# Altium PCB bug-brain__A.PcbDoc (part 1 of 2)
Units mm, origin at the board's own origin, x right, y up, seen from the top; angles counter-clockwise.
Board outline 50.8 x 50.8 mm, 6 copper layers (Top Layer, GND1, IN1, IN2, GND2, Bottom Layer), stack 2.491 mm thick; 50 components, 73 nets, 290 pads, 119 vias.
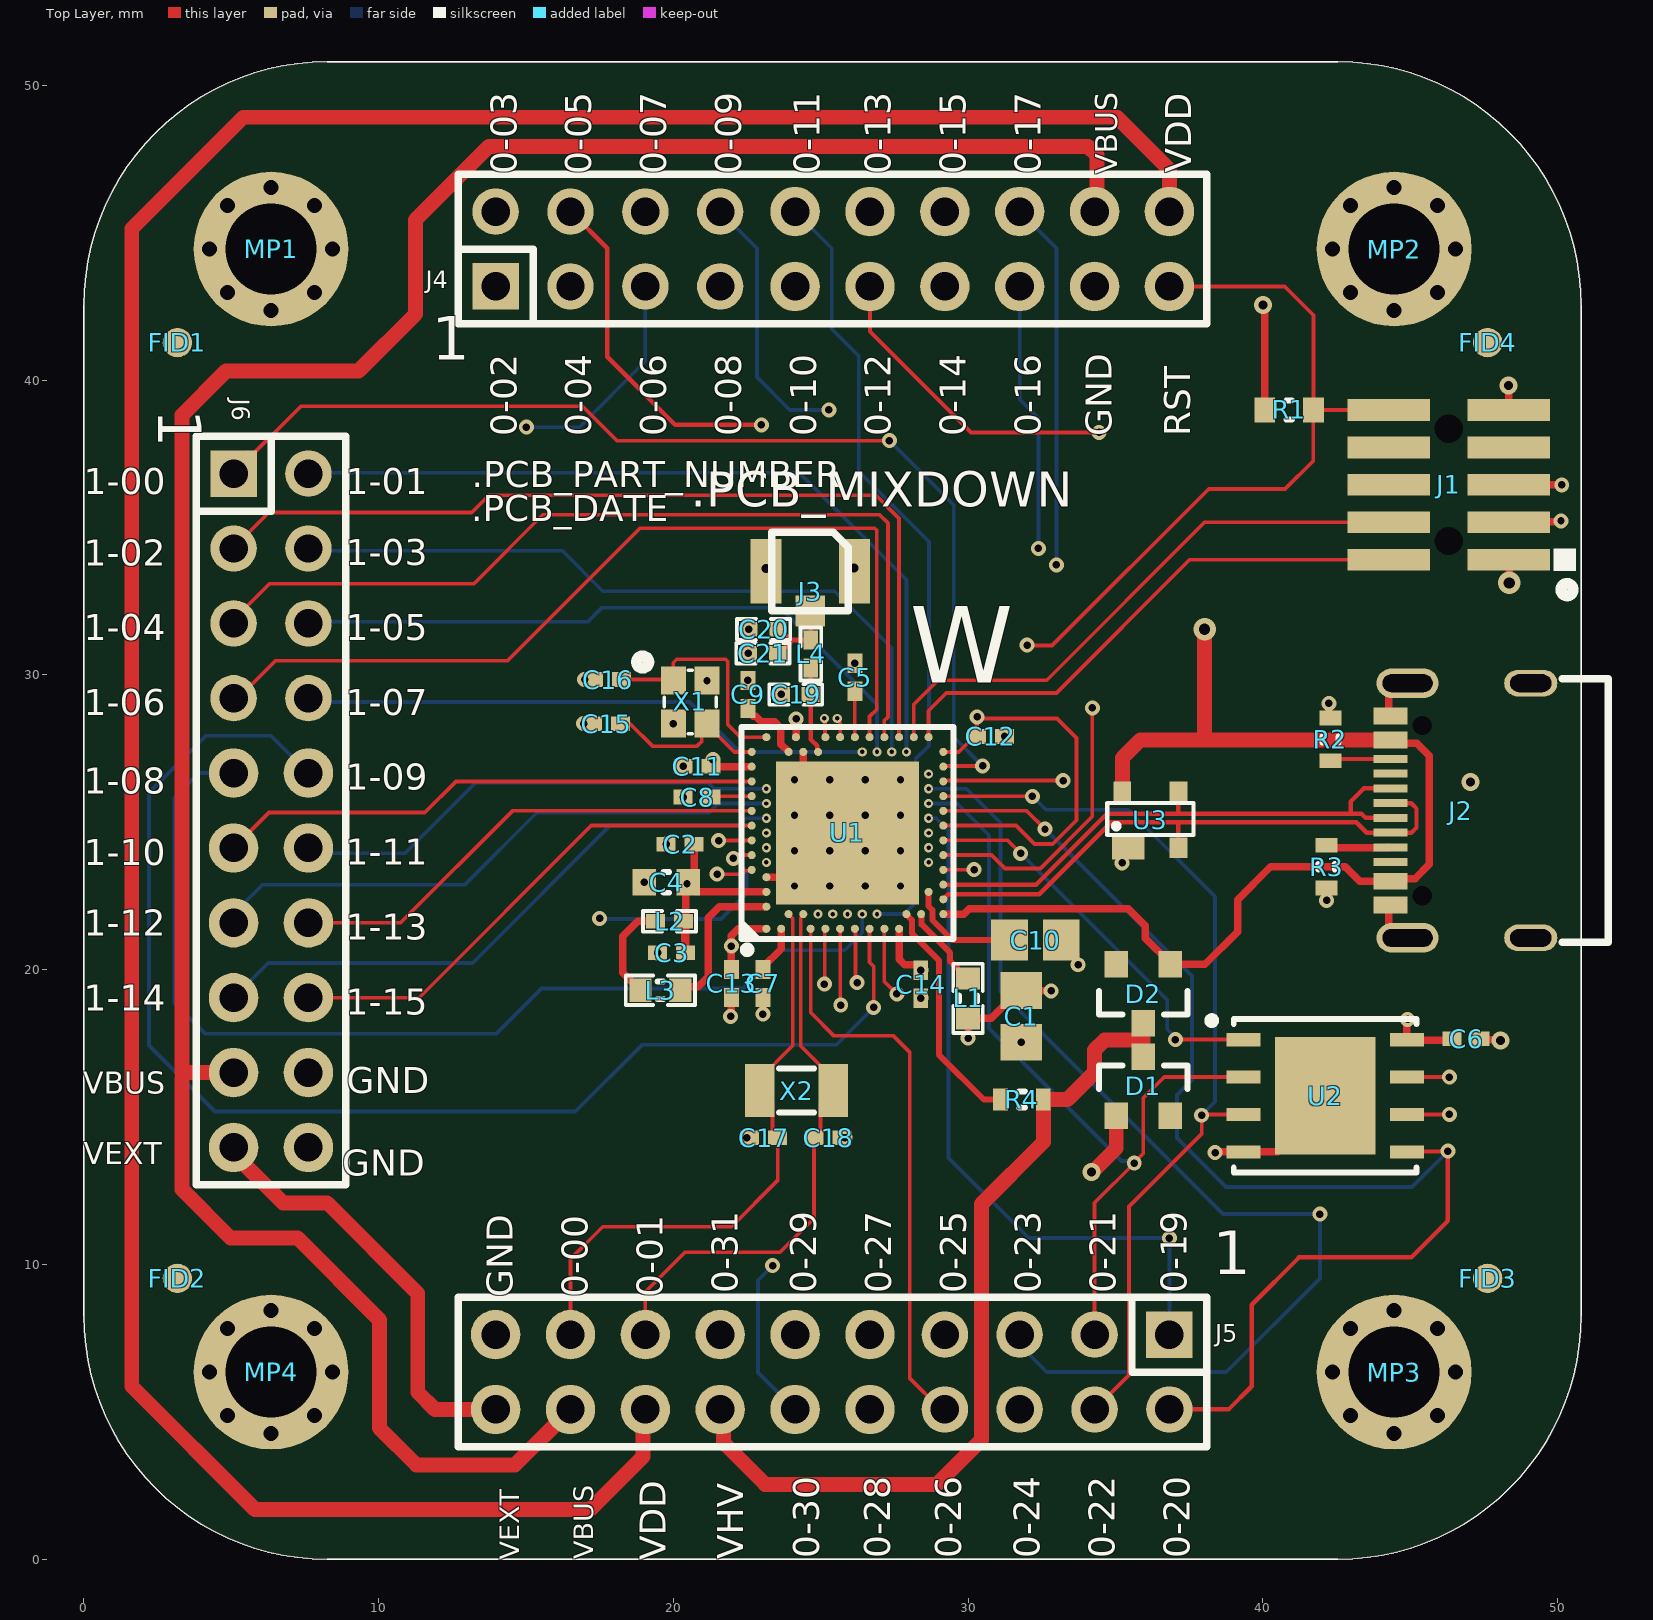
[diagram p0: Top Layer view]
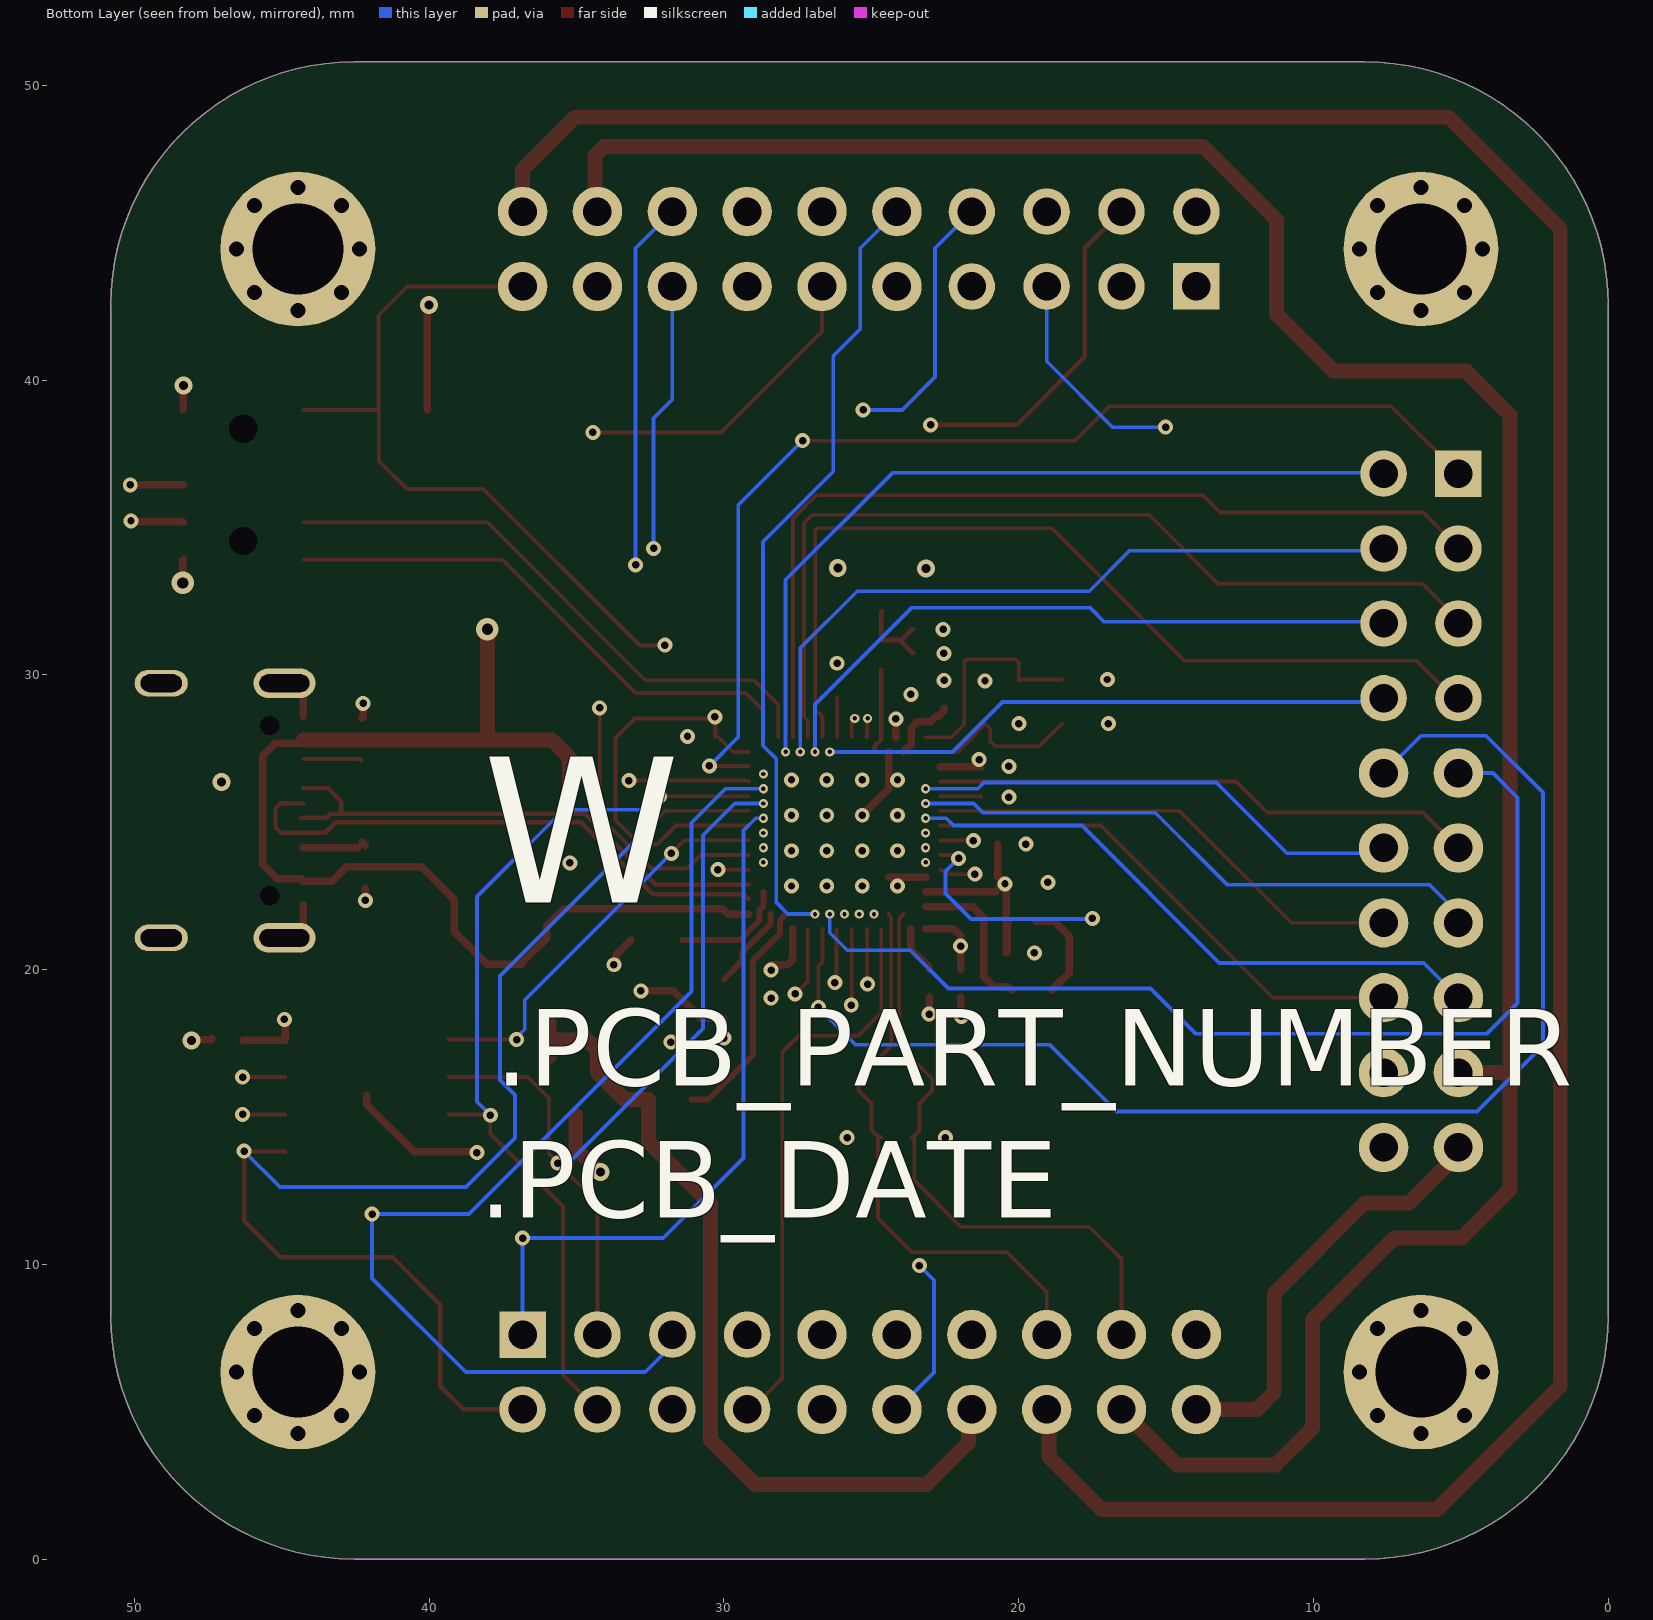
[diagram p1: Bottom Layer view, seen from below]
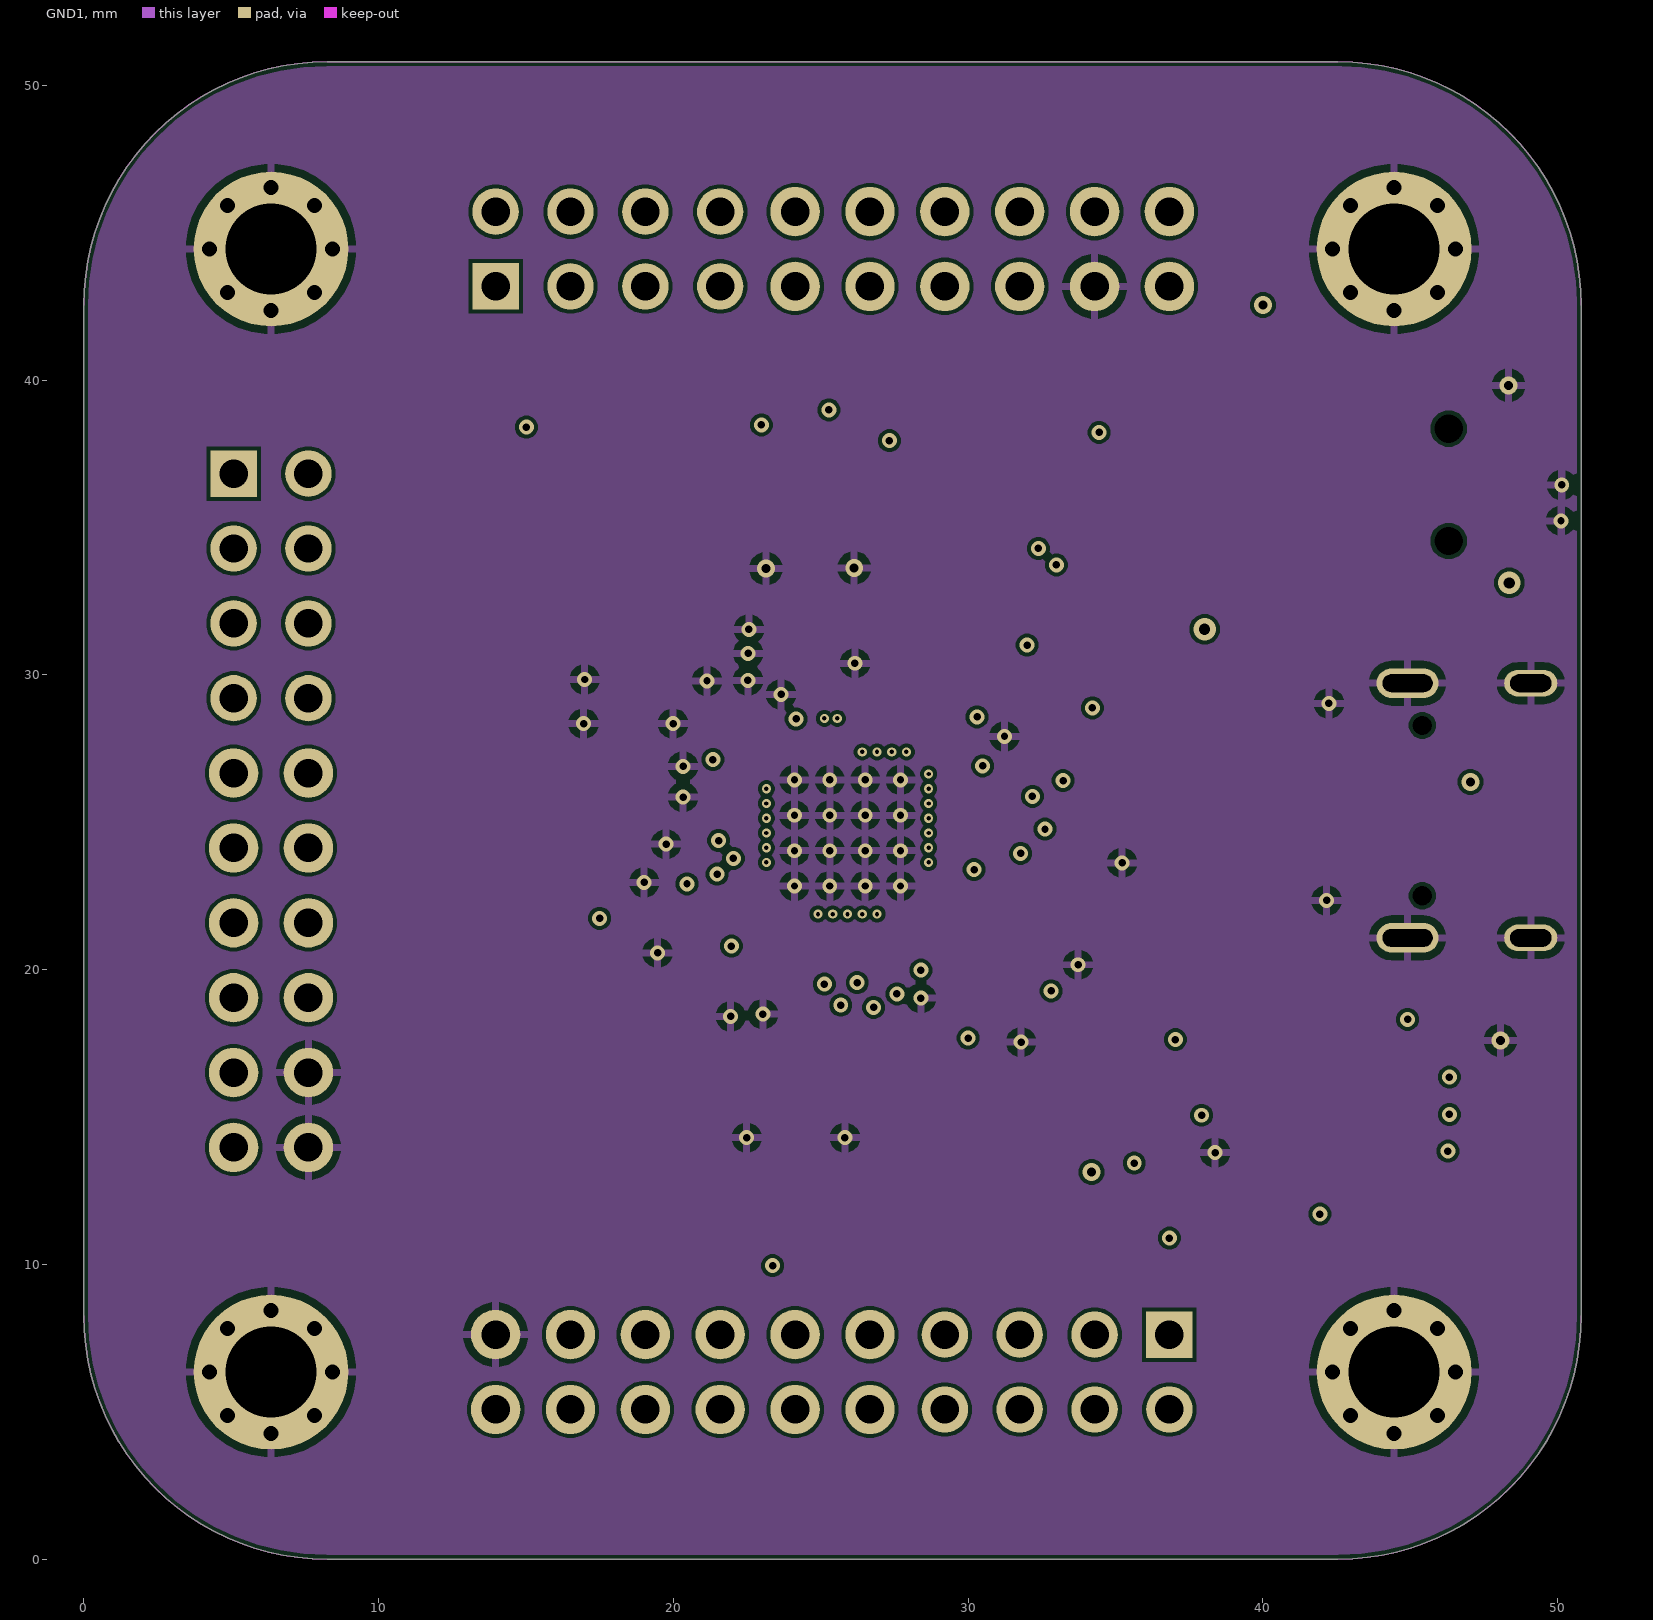
[diagram p2: GND1]
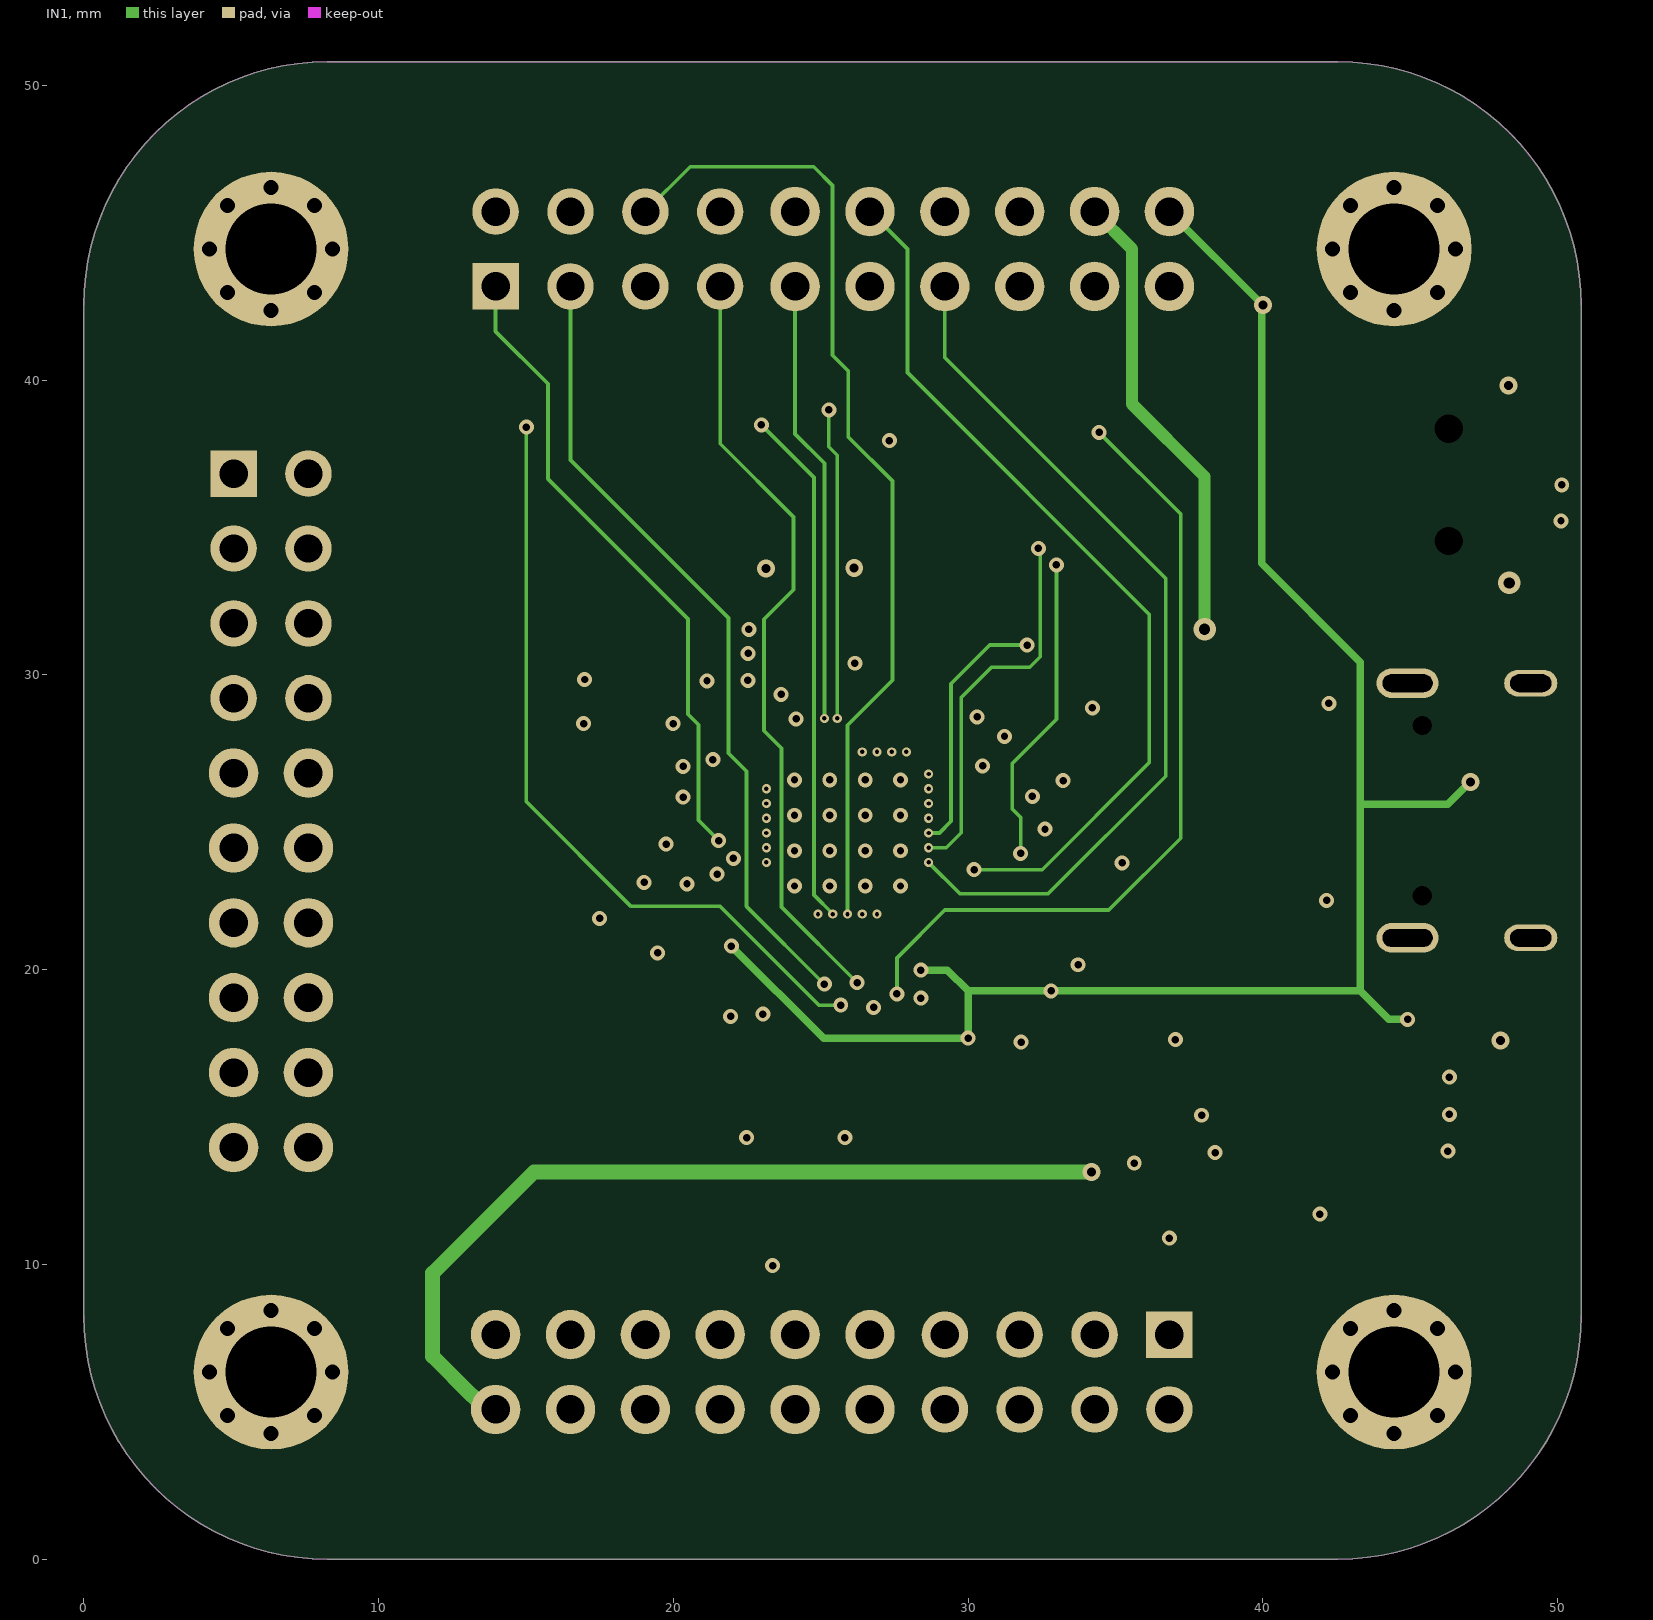
[diagram p3: IN1]
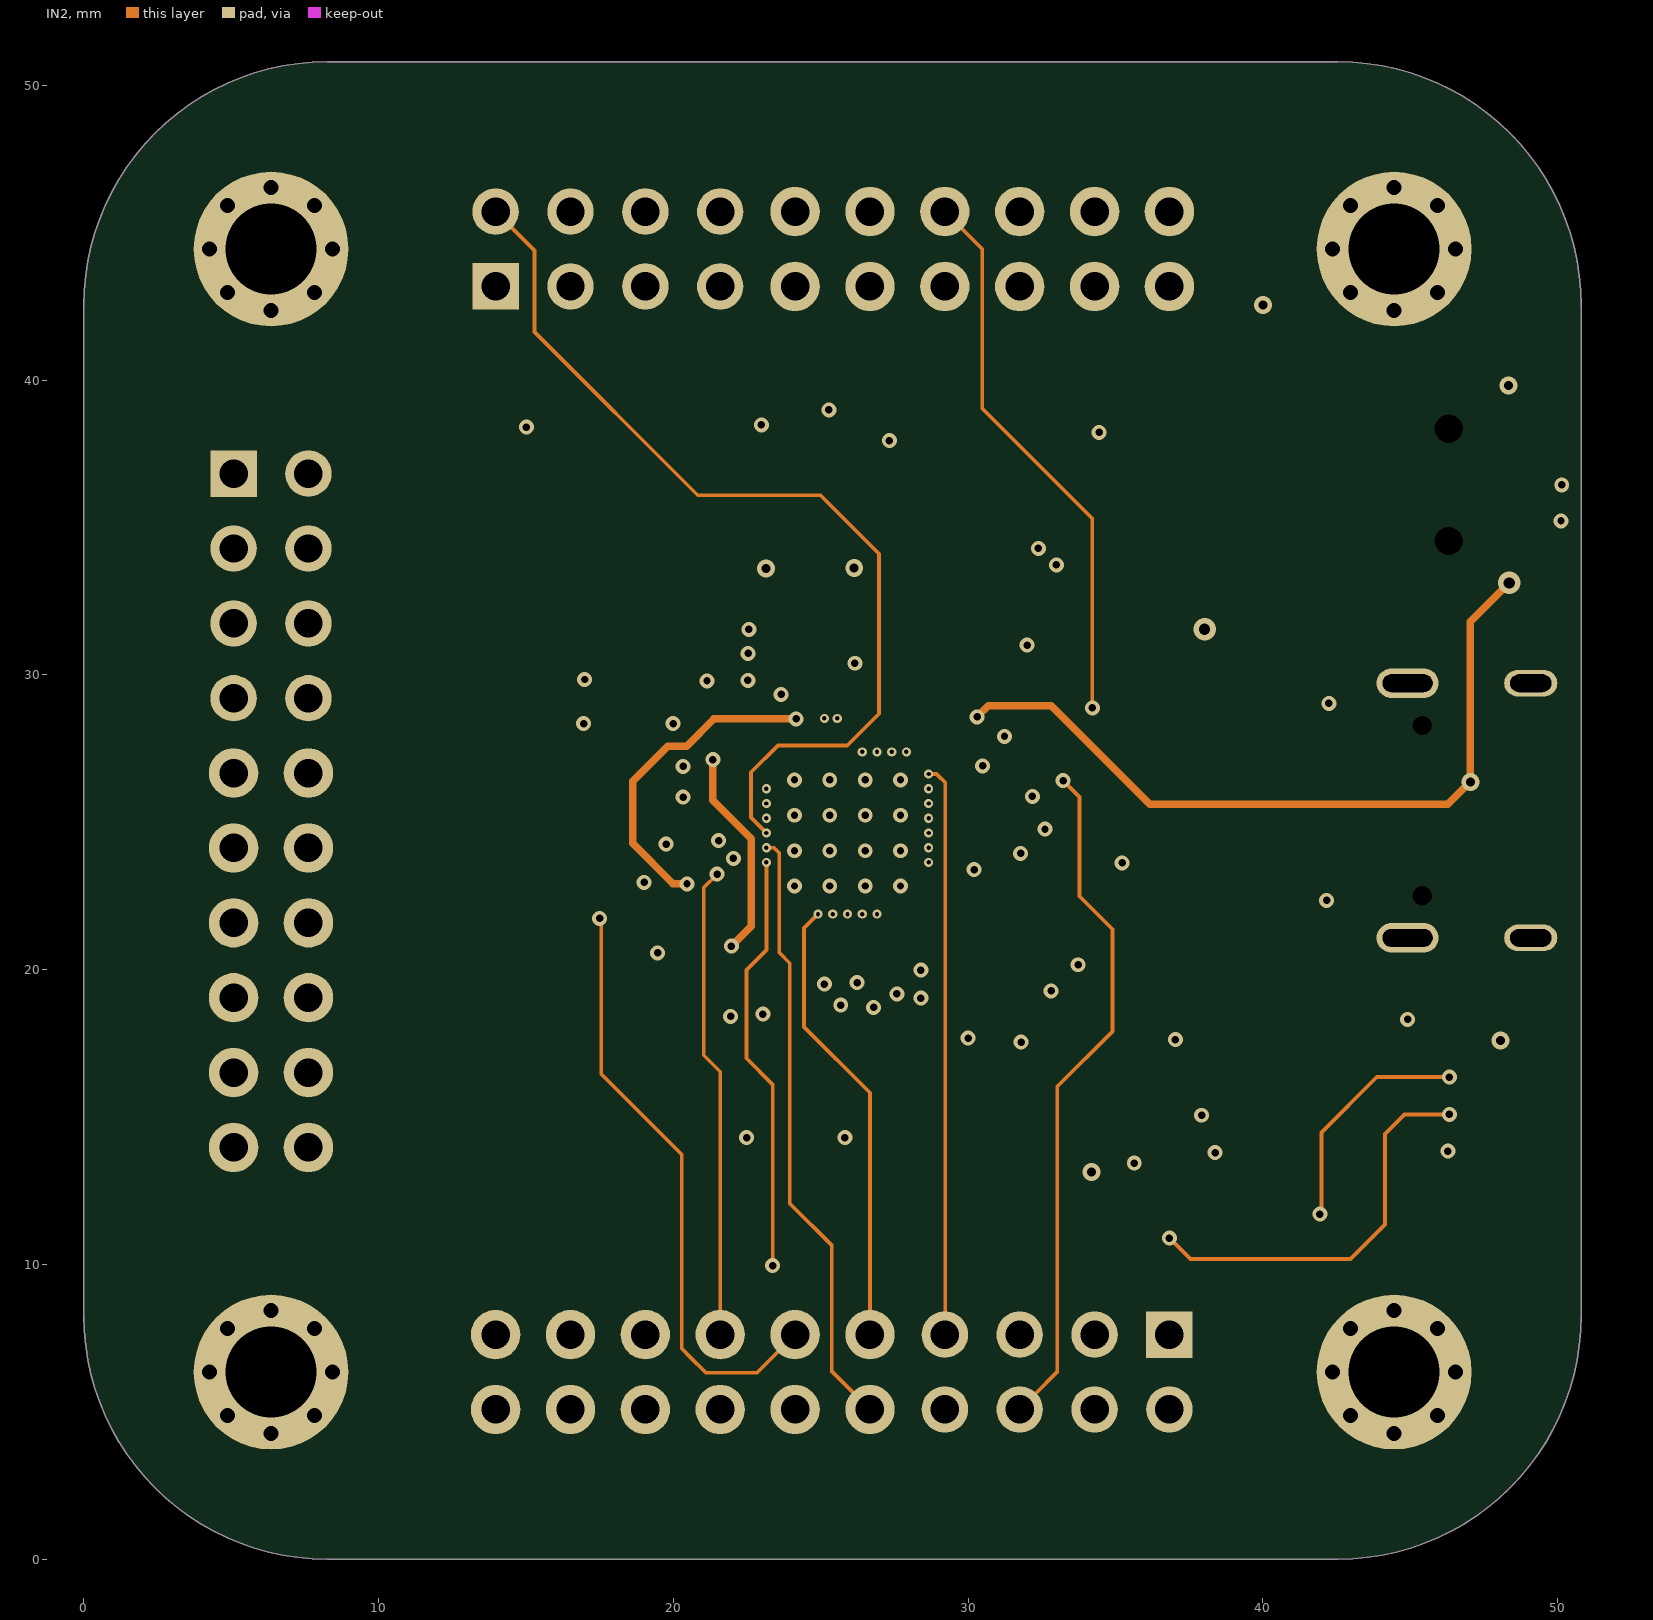
[diagram p4: IN2]
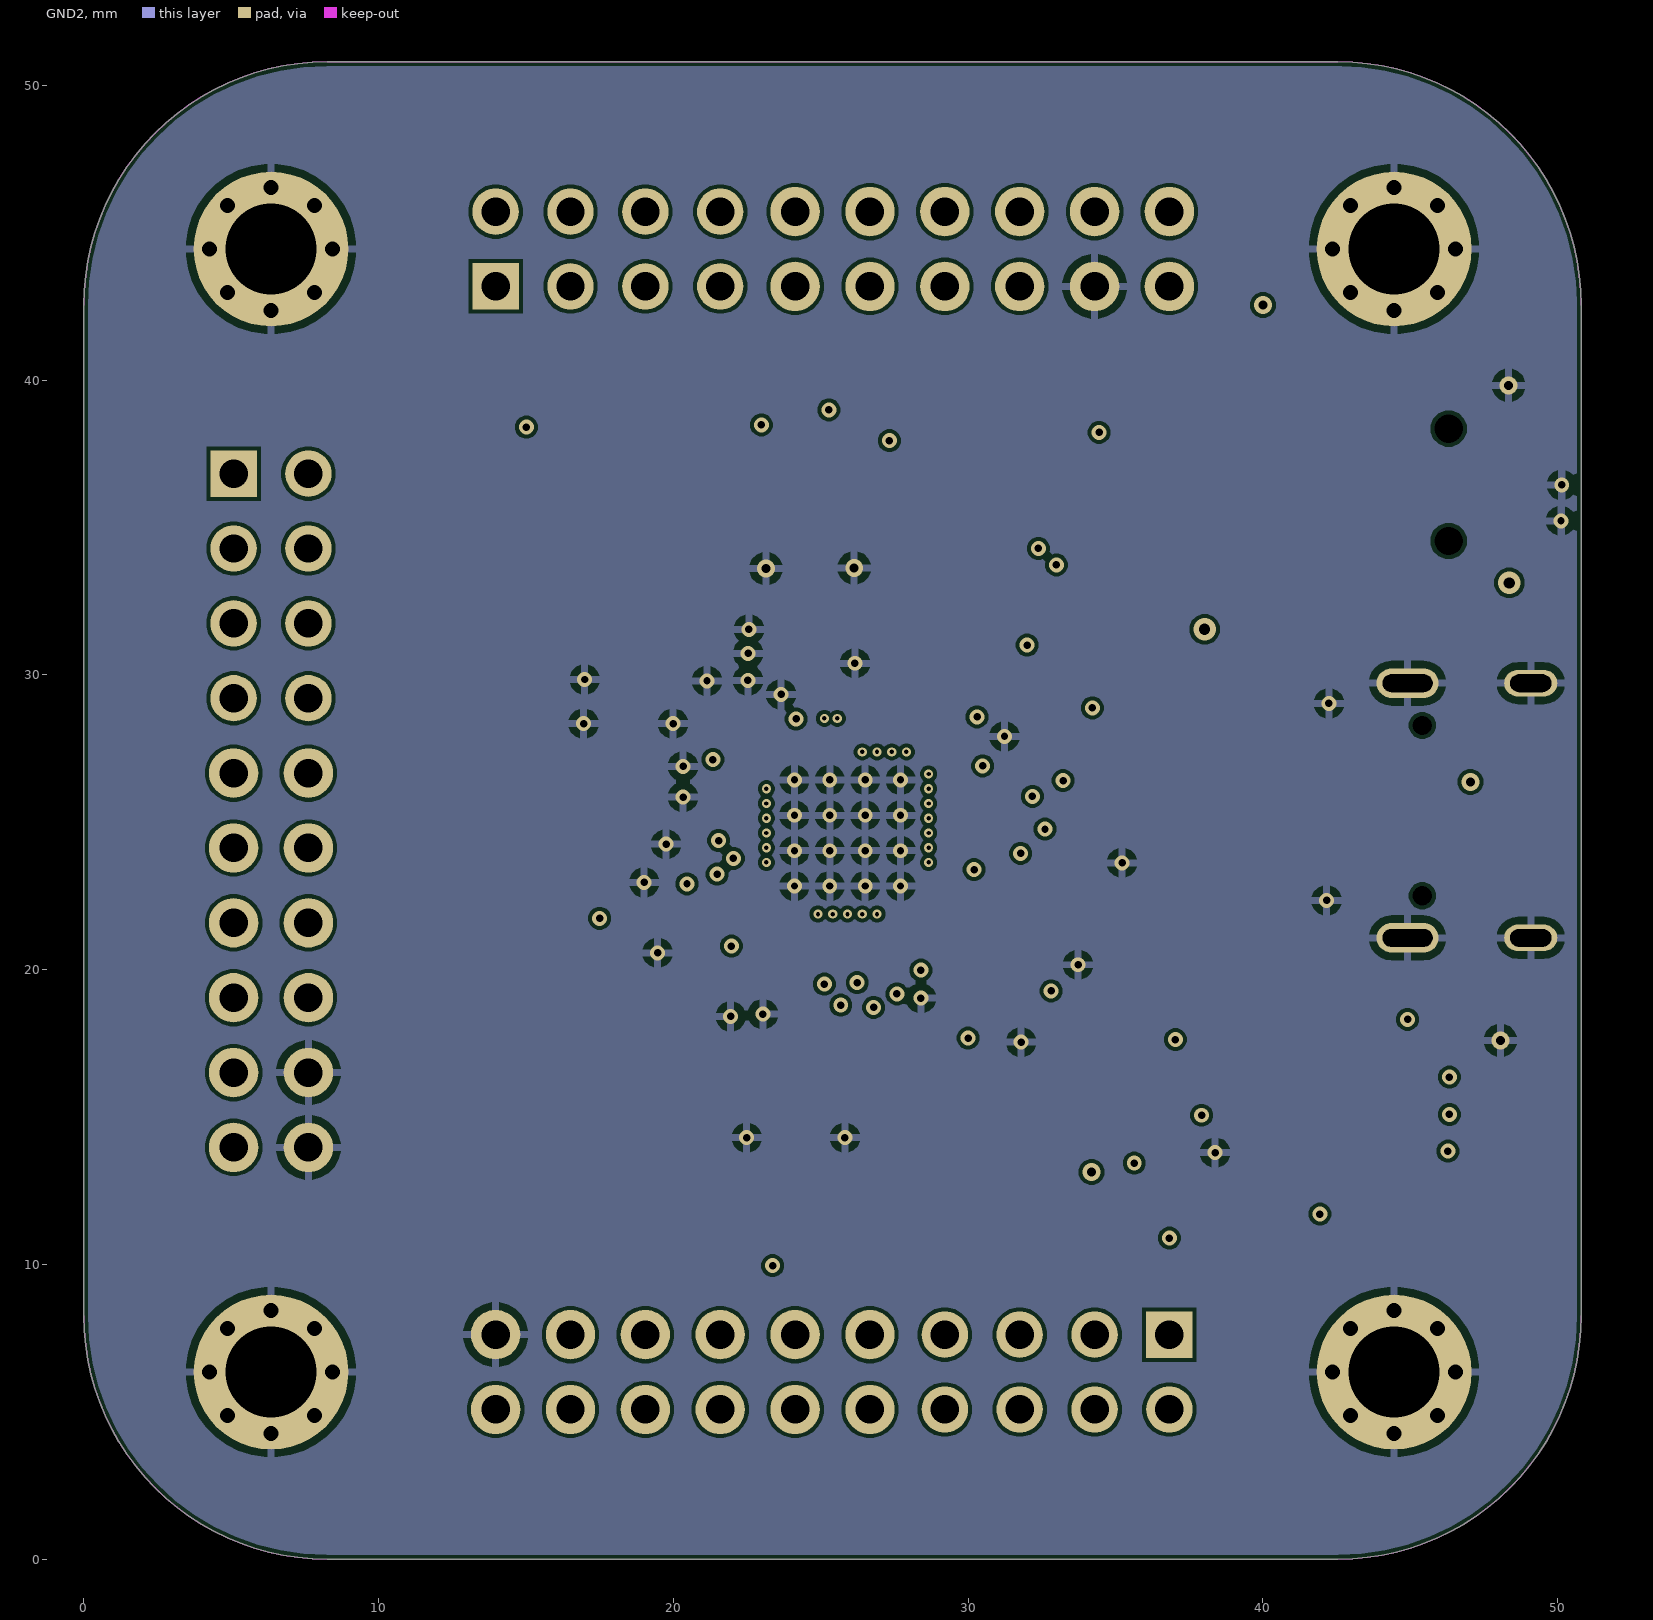
[diagram p5: GND2]
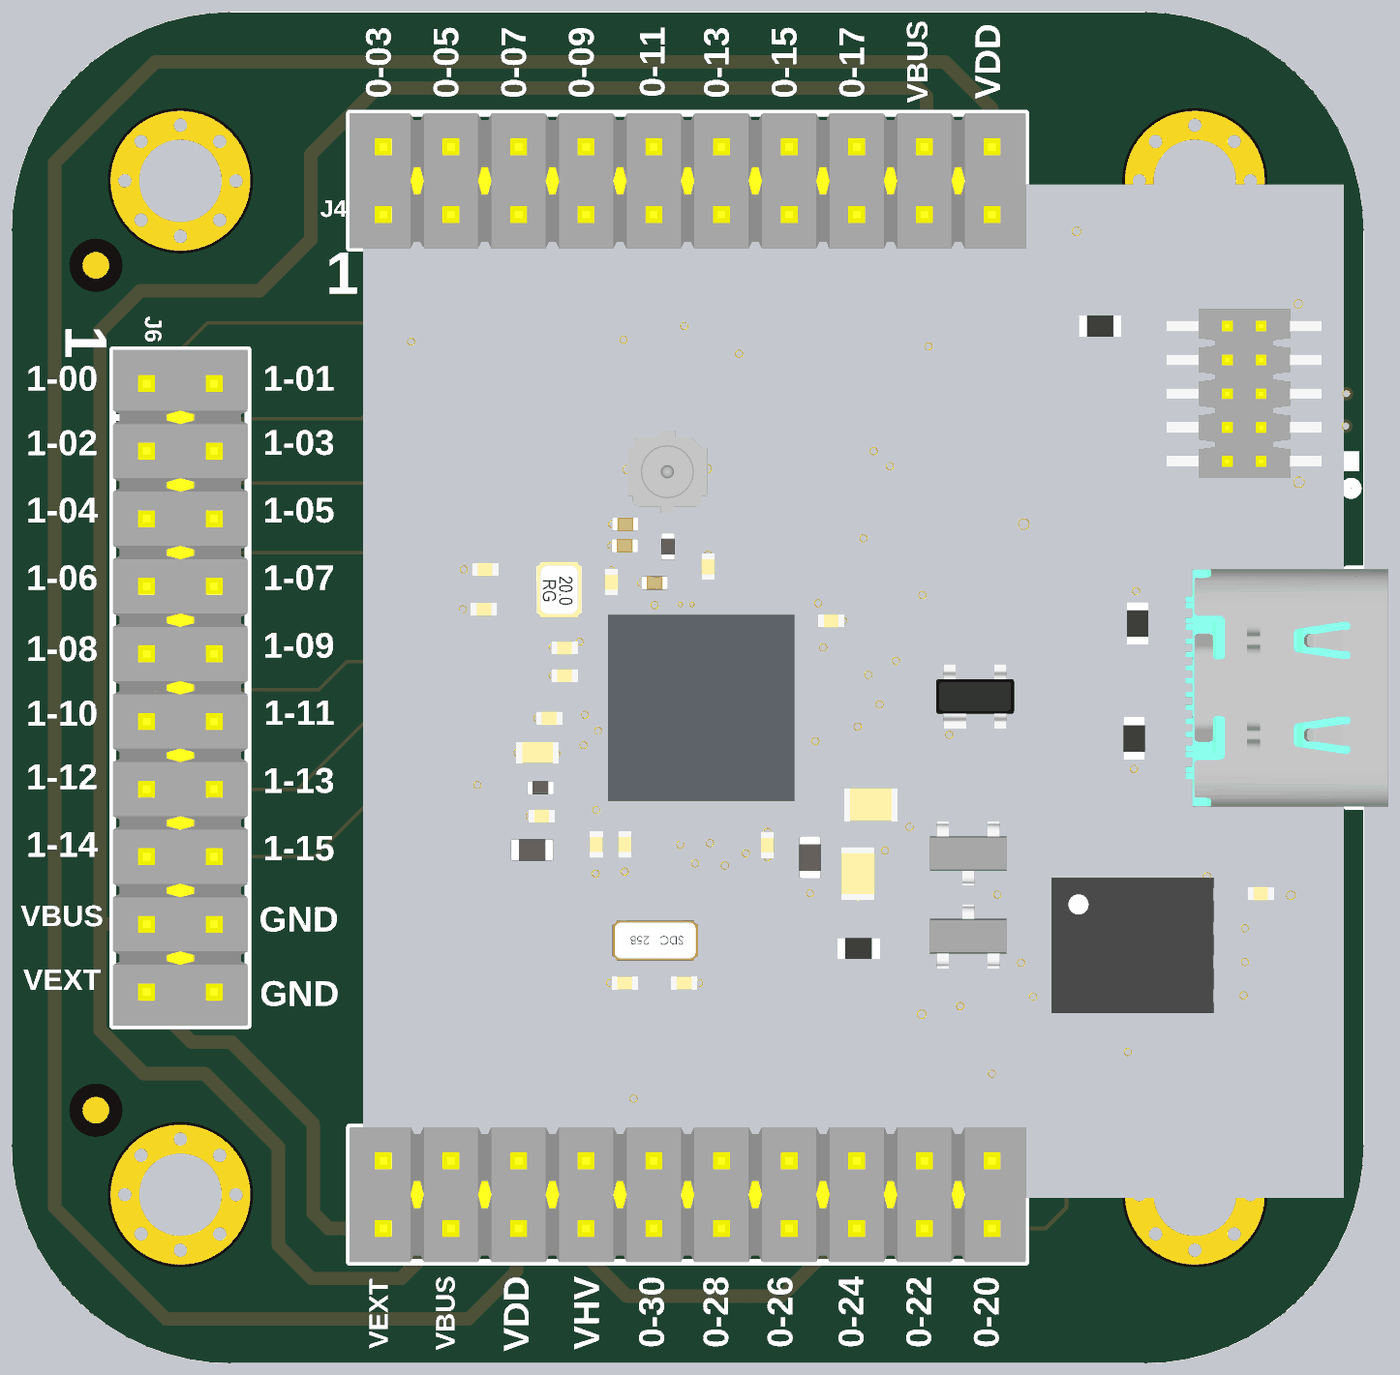
[diagram p6: 3D render of the assembled board from above, using the file's embedded part models]

## Layer stack, top to bottom
Top Solder: solder mask 0.0102, Solder Resist, Dk 3.5
Top Layer: signal copper 0.0356
Dielectric1: dielectric 1.4961, FR-4, Dk 4.8
GND1: signal copper 0.0356
Dielectric 1: prepreg 0.0711, PP-006, Dk 4.1
IN1: signal copper 0.035
Dielectric3: dielectric 0.32, FR-4, Dk 4.8
IN2: signal copper 0.035
Dielectric 2: prepreg 0.0711, PP-006, Dk 4.1
GND2: signal copper 0.0356
Dielectric2: dielectric 0.32, FR-4, Dk 4.8
Bottom Layer: signal copper 0.0356
Bottom Solder: solder mask 0.0102, Solder Resist, Dk 3.5

## Board outline
0,8.255 ccw(c8.255,8.255) 8.255,0 42.545,0 ccw(c42.545,8.255) 50.8,8.255 50.8,42.545 ccw(c42.545,42.545) 42.545,50.8 8.255,50.8 ccw(c8.255,42.545) 0,42.545

## Design rules (kind name [scope] priority, off if disabled: settings)
Clearance [All] p1: gap=0.127 ignorepadtopadclearanceinfootprint=FALSE
ComponentClearance [All] p1: gap=0 collisioncheckmode=3 verticalgap=0 showdistances=FALSE
HoleSize [All] p1: absolutevalues=TRUE maxlimit=12.7 minlimit=0.025 maxpercent=80.000 minpercent=20.000
PolygonConnect [All] p1: connectstyle=Relief reliefconductorwidth=0.254 reliefentries=4 polygonreliefangle="90 Angle" airgapwidth=0.254
RoutingVias [All] p1: holewidth=0.305 width=0.66 viastyle="Through Hole" minholewidth=0.127 minwidth=0.254 maxholewidth=1.27 maxwidth=1.905
SilkToSolderMaskClearance SilkscreenOverComponentPads [IsPad] p1: minsilkscreentomaskgap=0.254 clearancetoexposedcopper=TRUE
SolderMaskExpansion [All] p1: expansion=0.102 istentingtop=FALSE
SupplyNets "Schematic Supply Nets_6" [InNet('VDD')] p1: voltage=0.000
SupplyNets "Schematic Supply Nets_5" [InNet('VEXT')] p2: voltage=0.000
SupplyNets "Schematic Supply Nets_4" [InNet('GND')] p3: voltage=0.000
SupplyNets "Schematic Supply Nets_3" [InNet('VDDH')] p4: voltage=0.000
SupplyNets "Schematic Supply Nets_1" [InNet('VBUS')] p5: voltage=0.000
Width [All] p1: maxlimit=5.08 minlimit=0.102 preferedwidth=0.152
27 further rules are at their usual default settings.

## Components (designator, comment, footprint, x,y, rotation, side; value= is the part's Value field where it differs from the comment)
C1 "4.7µF" C0805_1.40MM_MD 31.801,18.415 r90 top
C2 "47nF" C0402_0.55MM_HD 20.226,24.257 r0 top value=0.047µF
C3 "47nF" C0402_0.55MM_HD 19.939,20.574 r0 top value=0.047µF
C4 "1µF" C0603_0.90MM_HD 19.761,22.962 r0 top
C5 "1000pF" C0402_0.55MM_HD 26.162,29.921 r270 top
C6 "0.1µF" C0402_0.55MM_HD 46.896,17.653 r180 top
C7 "0.1µF" C0402_0.55MM_HD 23.038,19.533 r90 top
C8 "0.1µF" C0402_0.55MM_HD 20.803,25.857 r0 top
C9 "100pF" C0402_0.55MM_HD 22.53,29.337 r270 top
C10 "4.7µF" C0805_1.40MM_MD 32.283,21.006 r180 top
C11 "0.1µF" C0402_0.55MM_HD 20.803,26.899 r0 top
C12 "0.1µF" C0402_0.55MM_HD 30.759,27.915 r180 top
C13 "0.1µF" C0402_0.55MM_HD 21.971,19.533 r90 top
C14 "0.1µF" C0402_0.55MM_HD 28.397,19.507 r90 top
C15 "8pF" C0402_0.55MM_HD 17.729,28.346 r180 top
C16 "8pF" C0402_0.55MM_HD 17.767,29.845 r180 top
C17 "8pF" C0402_0.55MM_HD 23.063,14.3 r0 top
C18 "8pF" C0402_0.55MM_HD 25.248,14.3 r180 top
C19 "0.8pF" CAPC1005X04L 24.155,29.337 r0 top
C20 "0.5pF" CAPC1005X04L 23.063,31.547 r0 top
C21 "1.2pF" CAPC1005X04L 23.038,30.734 r180 top
D1 "BAT400D-7-F" D_SOT-23-3_P 35.941,16.053 r90 top
D2 "BAT400D-7-F" D_SOT-23-3_P 35.941,19.177 r270 top
FID1 "Fiducial" fiducial-1mm-2mm 3.175,41.275 r0 top
FID2 "Fiducial" fiducial-1mm-2mm 3.175,9.525 r0 top
FID3 "Fiducial" fiducial-1mm-2mm 47.625,9.525 r0 top
FID4 "Fiducial" fiducial-1mm-2mm 47.625,41.275 r0 top
J1 "20021121-00010T4LF" FTSH-105-05-F-DV 46.304,36.449 r90 top
J2 "12402012E212A" 12402012E212A 51.689,25.4 r90 top
J3 "1909763-1" 1909763-1 24.638,32.842 r0 top
J4 "2x10 Header" 100_2_10 25.4,44.45 r0 top locked
J5 "2x10 Header" 100_2_10 25.4,6.35 r180 top locked
J6 "2x10 Header" 100_2_10 6.35,25.4 r270 top locked
L1 "10µH" INDC1608X06L 29.997,19.025 r90 top
L2 "15nH" INDC1005X04L 19.87,21.641 r180 top
L3 "10µH" INDC1608X06L 19.558,19.304 r0 top
L4 "4.7nH" INDC1005X04L 24.663,30.709 r90 top
MP1 "ISO M2.5" M2.5 6.35,44.45 r0 top value=M2.5
MP2 "ISO M2.5" M2.5 44.45,44.45 r0 top value=M2.5
MP3 "ISO M2.5" M2.5 44.45,6.35 r0 top value=M2.5
MP4 "ISO M2.5" M2.5 6.35,6.35 r0 top value=M2.5
R1 "10kΩ" R0603_0.55MM_MD 40.894,38.989 r0 top
R2 "5.1kΩ" R0603_0.55MM_HD 42.291,27.813 r270 top
R3 "5.1kΩ" R0603_0.55MM_HD 42.164,23.495 r90 top
R4 "0Ω" R0603_0.55MM_HD 31.826,15.596 r0 top
U1 "NRF52840-QIAA-R" AQFN50P700X700X85_HS-74N 25.908,24.638 r90 top locked
U2 "MX25R6435FZNIL0" SON127P600X80_HS-9N 42.113,15.723 r0 top
U3 "PRTR5V0U2X,215" SOT143B 35.433,24.135 r0 top
X1 "32MHz" XTAL_2016 20.574,29.083 r270 top
X2 "32KHz" XTAL_3215 24.181,15.9 r180 top

## Footprints (in the part's own frame and the unit in brackets; to place one, negate y for a bottom-side part, rotate by r counter-clockwise, add the part's x,y. Pads: shape width x height; smd on the part's side, far side on the other; paste and mask are expansions set on the pad)
100_2_10 [mil]
  rect 62x62 hole 38: 1(-450,-50)
  round 62 hole 38: 2(-450,50) 3(-350,-50) 4(-350,50) 5(-250,-50) 6(-250,50) 7(-150,-50) 8(-150,50)
  round 66 hole 38: 9(-50,-50) 10(-50,50) 11(50,-50) 12(50,50) 13(150,-50) 14(150,50) 15(250,-50) 16(250,50) 17(350,-50) 18(350,50) 19(450,-50) 20(450,50)
  silkscreen extent -500,-100 500,100, body extent -500,-100 500,100, height 330
1909763-1 [mm] "CONN UMCC JACK STR 50OHM SMD"
  rect 1.05x2.2 smd: 1(-1.5,0.675) 2(1.5,0.675)
  rect 1x1.05 smd: 3(0,-0.675)
  silkscreen extent -1.3,-0.67 1.3,2, body extent -1.5,-0.87 1.5,2.23, height 1.24
12402012E212A [mm] "USB-C  2.0"
  round 0 hole 0.65: 71(2.89,6.28) ALIGN1(-2.89,6.28)
  rect 0.575x1.15 smd: A1B12(-3.2,7.355) A4B9(-2.4,7.355) B1A12(3.2,7.355) B4A9(2.4,7.355)
  rect 0.275x1.15 smd: A5(-1.25,7.355) A6(-0.25,7.355) A7(0.25,7.355) A8(1.25,7.355) B5(1.75,7.355) B6(0.75,7.355) B7(-0.75,7.355) B8(-1.75,7.355)
  oval 1x2.1 hole 0.6 slot 1.7 at 90 deg: M1(-4.32,6.78) M2(4.32,6.78)
  oval 0.9x1.8 hole 0.6 slot 1.4 at 90 deg: M3(-4.32,2.6) M4(4.32,2.6)
  silkscreen extent -4.47,-0.03 4.47,1.52, body extent -4.47,-0.02 4.47,7.58, height 3.27
AQFN50P700X700X85_HS-74N [mm] "AQFN, 73-Leads, Body 7.00x7.00mm, Pitch 0.50mm, Thermal Pad 4.95x4.95mm, IPC Medium Density"
  rect 4.85x4.85 smd mask+0.05: 74(0,0)
  round 0.275 smd paste+0.012 mask+0.05: A8(-1.25,3.25) A10(-0.75,3.25) A12(-0.25,3.25) A14(0.25,3.25) A16(0.75,3.25) A18(1.25,3.25) A20(1.75,3.25) A22(2.25,3.25) A23(2.75,3.25) AA24(3.25,-2.25) AB2(-2.75,-2.5) AC5(-2,-2.75) AC9(-1,-2.75) AC11(-0.5,-2.75) AC13(0,-2.75) AC15(0.5,-2.75) AC17(1,-2.75) AC19(1.5,-2.75) AC21(2,-2.75) AC24(3.25,-2.75) AD2(-2.75,-3.25) AD4(-2.25,-3.25) AD6(-1.75,-3.25) AD8(-1.25,-3.25) AD10(-0.75,-3.25) AD12(-0.25,-3.25) AD14(0.25,-3.25) AD16(0.75,-3.25) AD18(1.25,-3.25) AD20(1.75,-3.25) AD22(2.25,-3.25) AD23(2.75,-3.25) B1(-3.25,2.75) B3(-2.5,2.75) B5(-2,2.75) B7(-1.5,2.75) B9(-1,2.75) B11(-0.5,2.75) B13(0,2.75) B15(0.5,2.75) B17(1,2.75) B19(1.5,2.75) B24(3.25,2.75) C1(-3.25,2.25) D2(-2.75,2) D23(2.75,2) E24(3.25,1.75) F2(-2.75,1.5) F23(2.75,1.5) G1(-3.25,1.25) H2(-2.75,1) H23(2.75,1) J1(-3.25,0.75) J24(3.25,0.75) K2(-2.75,0.5) L1(-3.25,0.25) L24(3.25,0.25) M2(-2.75,0) N1(-3.25,-0.25) N24(3.25,-0.25) P2(-2.75,-0.5) P23(2.75,-0.5) R1(-3.25,-0.75) R24(3.25,-0.75) T2(-2.75,-1) T23(2.75,-1) U1(-3.25,-1.25) U24(3.25,-1.25) V23(2.75,-1.5) W1(-3.25,-1.75) W24(3.25,-1.75) Y2(-2.75,-2) Y23(2.75,-2)
  silkscreen extent -4.09,-3.6 3.6,3.6, body extent -3.5,-3.5 3.5,3.5, height 0.87
C0402_0.55MM_HD [mm] "Capacitor 0402 0.55mm Height- High Density"
  rect 0.65x0.5 smd: 1(-0.475,0) 2(0.475,0)
  body extent -0.53,-0.25 0.48,0.25, height 0.55
C0603_0.90MM_HD [mm] "Capacitor 0603 - High Density"
  rect 0.8x0.9 smd: 1(-0.75,0) 2(0.75,0)
  silkscreen extent -0.1,-0.35 0.1,0.35, body extent -0.8,-0.4 0.8,0.4, height 0.9
C0805_1.40MM_MD [mm] "Capacitor - 0805 - Medium Density"
  rect 1.25x1.4 smd: 1(-0.875,0) 2(0.875,0)
  body extent -1,-0.62 1,0.63, height 1.45
CAPC1005X04L [mm] "Chip Capacitor, 2-Leads, Body 1.0x0.5mm, IPC High Density"
  rect 0.6x0.5 smd: 1(-0.5,0) 2(0.5,0)
  silkscreen extent -0.9,-0.35 0.9,0.35, body extent -0.5,-0.25 0.5,0.25, height 0.5
D_SOT-23-3_P [mm] "Diode - SOT-23-3 - Polarized"
  rect 0.9x0.8 smd: 1(-1,0.915) 2(-1,-0.915) 3(1,0)
  silkscreen extent -0.1,-1.5 0.7,1.5, body extent -1.2,-1.45 1.22,1.45, height 0.98
fiducial-1mm-2mm [mm] "1mm Pad 2mm Opening"
  round 1 smd paste-2539.97 mask+0.5: 1(0,0)
FTSH-105-05-F-DV [mil]
  rect 29x110 smd: 1(-100,-80) 2(-100,80) 3(-50,-80) 4(-50,80) 5(0,-80) 6(0,80) 7(50,-80) 8(50,80) 9(100,-80) 10(100,80)
  rect 0x0 hole 38 unplated: M(-75,0) M(75,0)
  silkscreen extent -115,-170 -85,-140, body extent -125,-115 125,115, height 285
INDC1005X04L [mm] "Chip Inductor, 2-Leads, Body 1.0x0.5mm, IPC High Density"
  rect 0.65x0.5 smd: 1(-0.475,0) 2(0.475,0)
  silkscreen extent -0.9,-0.35 0.9,0.35, body extent -0.5,-0.25 0.5,0.25, height 0.5
INDC1608X06L [mm] "Chip Inductor, 2-Leads, Body 1.6x0.8mm, IPC High Density"
  rect 0.75x0.8 smd: 1(-0.675,0) 2(0.675,0)
  silkscreen extent -1.17,-0.5 1.17,0.5, body extent -0.8,-0.4 0.8,0.4, height 0.8
M2.5 [mm]
  round 0 hole 0.5: 1(-2.087,0) 1(-1.476,-1.476) 1(-1.476,1.476) 1(0,-2.087) 1(0,2.087) 1(1.476,-1.476) 1(1.476,1.476) 1(2.087,0)
  round 5.25 hole 3.1: 1(0,0)
R0603_0.55MM_HD [mm] "Resistor 0603 High Density"
  rect 0.5x0.75 smd: 1(-0.725,0) 2(0.725,0)
  silkscreen extent -0.1,-0.28 0.1,0.28, body extent -0.8,-0.4 0.8,0.4, height 0.55
R0603_0.55MM_MD [mm] "Resistor 0603 Medium Density"
  rect 0.7x0.85 smd: 1(-0.825,0) 2(0.825,0)
  silkscreen extent -0.1,-0.33 0.1,0.33, body extent -0.8,-0.4 0.8,0.4, height 0.55
SON127P600X80_HS-9N [mm] "SON, 8-Leads, Body 5.00x6.00mm, Pitch 1.27mm, Thermal Pad 4.00x3.40mm, IPC Medium Density"
  rect 1.15x0.45 smd: 1(-2.77,1.905) 2(-2.77,0.635) 3(-2.77,-0.635) 4(-2.77,-1.905) 5(2.77,-1.905) 6(2.77,-0.635) 7(2.77,0.635) 8(2.77,1.905)
  rect 3.4x4 smd paste-1.7: 9(0,0)
  silkscreen extent -3.97,-2.6 3.1,2.67, body extent -3.05,-2.55 3.05,2.55, height 0.8
SOT143B [mm] "SOT143B"
  rect 1.1x0.8 smd: 1(0,0)
  rect 0.6x0.7 smd: 2(1.702,0) 3(1.702,1.9) 4(-0.2,1.9)
  silkscreen extent -0.71,0.43 2.21,1.52, body extent -0.7,-0.27 2.22,2.15, height 1
XTAL_2016 [mm] "Crystal 2.0 x 1.6 mm"
  rect 0.95x0.85 smd: 1(-0.725,-0.575) 2(0.725,-0.575) 3(0.725,0.575) 4(-0.725,0.575)
  silkscreen extent -1.08,-0.88 1.08,0.88, body extent -1.05,-0.85 1.05,0.85, height 0.56
XTAL_3215 [mm] "XTAL SMD 3.2 x 1.5 mm"
  rect 1x1.8 smd: 1(-1.25,0) 2(1.25,0)
  silkscreen extent -0.6,-0.75 0.6,0.75, body extent -1.6,-0.75 1.6,0.75, height 0.81

## Part data
C1 C10: library part GCM21BR71C475KA73K, "CAP CER 4.7UF 16V X7R 0805", JLCPCB Part #=C2167533, Manufacturer="Murata Electronics", Operating Temperature="-55°C ~ 125°C", Package=0805, Ratings=AEC-Q200, Temperature Coefficient=X7R, Tolerance=±10%, Voltage - Rated=16V, Category=Capacitors, Manufacturer Part Number=GCM21BR71C475KA73K, Substitution Notes="4.7µF , 16V , ±10% , X7R , -55°C ~ 125°C , AEC-Q200 , 0805", Thickness (Max)=1.40MM
C2 C3: library part GCM155R71C473KA37D, "CAP CER 0.047UF 16V X7R 0402", JLCPCB Part #=C126525, Manufacturer="Murata Electronics", Operating Temperature="-55°C ~ 125°C", Package=0402, Ratings=AEC-Q200, Supplier Part Number 1=490-6042-1-ND, Temperature Coefficient=X7R, Tolerance=±10%, Voltage - Rated=16V, Category=Capacitors, ComponentLink1Description="Datasheet (Internal)", ComponentLink1URL=https://psearch.en.murata.com/capacitor/product/GCM155R71C473KA37%23.pdf, ComponentLink2Description="Datasheet (External)", ComponentLink2URL=https://psearch.en.murata.com/capacitor/product/GCM155R71C473KA37%23.pdf, Manufacturer Part Number=GCM155R71C473KA37D, Substitution Notes="0.047µF , 16V , ±10% , X7R , -55°C ~ 125°C , AEC-Q200 , 0402", Supplier 1=Digikey, Thickness (Max)=0.55MM
C4: library part GCM188R71C105KA64J, "CAP CER 1UF 16V X7R 0603", JLCPCB Part #=C2169902, Manufacturer="Murata Electronics", Operating Temperature="-55°C ~ 125°C", Package=0603, Ratings=AEC-Q200, Temperature Coefficient=X7R, Tolerance=±10%, Voltage - Rated=16V, Category=Capacitors, Manufacturer Part Number=GCM188R71C105KA64J, Substitution Notes="1µF , 16V , ±10% , X7R , -55°C ~ 125°C , AEC-Q200 , 0603", Thickness (Max)=0.90MM
C5: library part GCM1555C1H102FA16D, "CAP CER 1000PF 50V C0G/NP0 0402", Manufacturer="Murata Electronics", Operating Temperature="-55°C ~ 125°C", Package=0402, Ratings=AEC-Q200, Supplier Part Number 1=490-16461-1-ND, Temperature Coefficient="C0G, NP0", Tolerance=±1%, Voltage - Rated=50V, Category=Capacitors, ComponentLink1Description="Datasheet (Internal)", ComponentLink1URL=https://search.murata.co.jp/Ceramy/image/img/A01X/G101/ENG/GCM1555C1H102FA16-01.pdf, ComponentLink2Description="Datasheet (External)", ComponentLink2URL=https://search.murata.co.jp/Ceramy/image/img/A01X/G101/ENG/GCM1555C1H102FA16-01.pdf, Manufacturer Part Number=GCM1555C1H102FA16D, Substitution Notes="1000pF , 50V , ±1% , C0G, NP0 , -55°C ~ 125°C , AEC-Q200 , 0402", Supplier 1=Digikey, Thickness (Max)=0.55MM
C6 C7 C8 C11 C12 C13 C14: library part GCM155R71H104KE02D, "CAP CER 0.1UF 50V X7R 0402", JLCPCB Part #=C85858, Manufacturer="Murata Electronics", Operating Temperature="-55°C ~ 125°C", Package=0402, Ratings=AEC-Q200, Supplier Part Number 1=490-10672-1-ND, Temperature Coefficient=X7R, Tolerance=±10%, Voltage - Rated=50V, Category=Capacitors, ComponentLink1Description="Datasheet (Internal)", ComponentLink1URL=https://search.murata.co.jp/Ceramy/image/img/A01X/G101/ENG/GCM155R71H104KE02-01.pdf, ComponentLink2Description="Datasheet (External)", ComponentLink2URL=https://search.murata.co.jp/Ceramy/image/img/A01X/G101/ENG/GCM155R71H104KE02-01.pdf, Manufacturer Part Number=GCM155R71H104KE02D, Substitution Notes="0.1µF , 50V , ±10% , X7R , -55°C ~ 125°C , AEC-Q200 , 0402", Supplier 1=Digikey, Thickness (Max)=0.55MM
C9: library part GCM1555C1H101FA16D, "CAP CER 100PF 50V C0G/NP0 0402", JLCPCB Part #=C2941926, Manufacturer="Murata Electronics", Operating Temperature="-55°C ~ 125°C", Package=0402, Ratings=AEC-Q200, Supplier Part Number 1=490-14349-1-ND, Temperature Coefficient="C0G, NP0", Tolerance=±1%, Voltage - Rated=50V, Category=Capacitors, ComponentLink1Description="Datasheet (Internal)", ComponentLink1URL=https://search.murata.co.jp/Ceramy/image/img/A01X/G101/ENG/GCM1555C1H101FA16-01.pdf, ComponentLink2Description="Datasheet (External)", ComponentLink2URL=https://search.murata.co.jp/Ceramy/image/img/A01X/G101/ENG/GCM1555C1H101FA16-01.pdf, Manufacturer Part Number=GCM1555C1H101FA16D, Substitution Notes="100pF , 50V , ±1% , C0G, NP0 , -55°C ~ 125°C , AEC-Q200 , 0402", Supplier 1=Digikey, Thickness (Max)=0.55MM
C15 C16 C17 C18: library part GCM1555C1H8R0DA16D, "CAP CER 8PF 50V C0G/NP0 0402", JLCPCB Part #=C126517, Manufacturer="Murata Electronics", Operating Temperature="-55°C ~ 125°C", Package=0402, Ratings=AEC-Q200, Supplier Part Number 1=490-13294-1-ND, Temperature Coefficient="C0G, NP0", Tolerance=±0.5pF, Voltage - Rated=50V, Category=Capacitors, ComponentLink1Description="Datasheet (Internal)", ComponentLink1URL=https://www.murata.com/~/media/webrenewal/support/library/catalog/products/capacitor/mlcc/c03e.ashx?la=en-us, ComponentLink2Description="Datasheet (External)", ComponentLink2URL=https://www.murata.com/~/media/webrenewal/support/library/catalog/products/capacitor/mlcc/c03e.ashx?la=en-us, Manufacturer Part Number=GCM1555C1H8R0DA16D, Substitution Notes="8pF , 50V , ±0.5pF , C0G, NP0 , -55°C ~ 125°C , AEC-Q200 , 0402", Supplier 1=Digikey, Thickness (Max)=0.55MM
C19: library part C0402-0.8p, "Capacitor, NP0, ±5%", JLCPCB Part #=C76915, Manufacturer=Murata, Manufacturer Part Number=GJM1555C1HR80BB01D, Part number IPS=00000007782, Part number NEMS=100200116, Part number Norautron=N.A., Artikkelnr Noca=N.A., Author=rsk, Component Class=Capacitors, Component Status=Active, ComponentLink1Description=Datasheet, ComponentLink1URL=https://www.murata.com/~/media/webrenewal/support/library/catalog/products/capacitor/mlcc/c02e.ashx?la=en-us, ComponentLink2Description="Supplier link", ComponentLink2URL=N.A., Footprint Doc=0402, HelpURL=N.A., LatestRevisionDate=2012-11-21, Note=50V, Pad Count=2, Part Number=C0402-0.8p, PartId=100200116, Published=2009-05-08, Supplier 1=N.A., Supplier 2=N.A., Supplier Part Number 1=N.A., Supplier Part Number 2=N.A.
C20: library part C0402-0.5p, "Capacitor, C0G, ±0.05pF, 50V", JLCPCB Part #=C76911, Manufacturer=Murata, Manufacturer Part Number=GJM1555C1HR50BB01D, Part number IPS=00000004293, Part number NEMS=100200112, Part number Norautron=N.A., Artikkelnr Noca=N.A., Author=rsk, Component Class=Capacitors, Component Status=Active, ComponentLink1Description=Datasheet, ComponentLink1URL=N.A., ComponentLink2Description="Supplier link", ComponentLink2URL=N.A., Footprint Doc=0402, HelpURL=N.A., LatestRevisionDate=2020-10-13, Note=50V, Pad Count=2, Part Number=C0402-0.5p, PartId=100200112, Published=2009-05-08, Supplier 1=N.A., Supplier 2=N.A., Supplier Part Number 1=N.A., Supplier Part Number 2=N.A.
C21: library part C0402-1.2p, "Capacitor, NP0, ±0.1pF", JLCPCB Part #=C2178250, Manufacturer=Manufactrer, Manufacturer Part Number=GCQ1555C1H1R2CB01D, Part number NEMS=100200119, Part number Norautron=N.A., Artikkelnr Noca=20029157, Author=rsk, Component Class=Capacitors, Component Status=Active, ComponentLink1Description=Datasheet, ComponentLink1URL=N.A., ComponentLink2Description="Supplier link", ComponentLink2URL=N.A., Footprint Doc=0402, HelpURL=N.A., LatestRevisionDate=2011-05-11, Note=50V, Pad Count=2, Part Number=C0402-1.2p, Part number IPS=GCQ1555C1H1R2CB01D, PartId=100200119, Published=2009-05-08, Supplier 1=N.A., Supplier 2=N.A., Supplier Part Number 1=N.A., Supplier Part Number 2=N.A.
D1 D2: "DIODE SCHOTTKY 40V 500MA SOT23", Capacitance @ Vr- F="125pF @ 0V- 1MHz", Current - Average Rectified (Io)=500mA, Current - Reverse Leakage @ Vr="50µA @ 30V", JLCPCB Part #=C134393, Manufacturer="Diodes Inc", Package="TO-236-3- SC-59- SOT-23-3", Supplier Device Package=SOT-23-3, Supplier Part Number 1=BAT400D-FDICT-ND, Voltage - DC Reverse (Vr) (Max)=40V, Voltage - Forward (Vf) (Max) @ If="550mV @ 500mA", Category=Diodes, CategorySort=400, ComponentLink1Description="Internal Datasheet", ComponentLink1URL=http://www.diodes.com/datasheets/ds30182.pdf, ComponentLink2Description="External Datasheet", ComponentLink2URL=http://www.diodes.com/datasheets/ds30182.pdf, Diode Suffix=1A_3C, Diode Type=Schottky, Manufacturer Part Number=BAT400D-7-F, Mounting Type="Surface Mount", Num Pins=3, Packaging="Cut Tape (CT)", Reverse Recovery Time (trr)=-, SortValue=BAT400D-7-F, Speed="Fast Recovery =< 500ns- > 200mA (Io)", Supplier 1=Digi-Key
FID1 FID2 FID3 FID4: library part fiducial-1mm-2mm, "PCB Fiducial", Category=misc, Manufacturer Part Number=fiducial-1mm-2mm
J1: "Connector Header Surface Mount 10 position 0.050\" (1.27mm)", JLCPCB Part #=C598540, Manufacturer="Amphenol ICC", Manufacturer Part Number=20021121-00010T4LF
J2: "CONN RCP USB2.0 TYP C 24P SMD RA", JLCPCB Part #=C5150972, Manufacturer="Amphenol ICC (Commercial Products)", Category=connectors/usb, Manufacturer Part Number=12402012E212A
J3: "CONN UMCC JACK STR 50OHM SMD", Dielectric Material="Liquid Crystal Polymer (LCP)", Housing Color=Ivory, Manufacturer="TE Connectivity AMP Connectors", Operating Temperature="-40°C ~ 90°C", Supplier Part Number 1=A118077CT-ND, Voltage Rating=60V, Body Finish=Gold, Body Material="Copper Alloy", Cable Group=-, Category="Connectors, Interconnects", Center Contact Material="Copper Alloy", Center Contact Plating=Gold, ComponentLink1Description=http://www.te.com/commerce/DocumentDelivery/DDEController?Action=srchrtrv&DocNm=1909763&DocType=Customer+Drawing&DocLang=English, ComponentLink1URL=http://www.te.com/commerce/DocumentDelivery/DDEController?Action=srchrtrv&DocNm=1909763&DocType=Customer+Drawing&DocLang=English, Connector Style="Ultra Miniature Coaxial", Connector Type="Jack, Male Pin", Contact Termination=Solder, Fastening Type=Snap-On, Features=-, Impedance="50 Ohm", Includes=-, Ingress Protection=-, Insertion Loss=0.24dB, JLCPCB Part #=1909763-1, Manufacturer Part Number=1909763-1, Mating Cycles=30, Mounting Feature=-, Mounting Type="Surface Mount", Packaging="Cut Tape (CT)", Part Status=Active, Pricing 1="1=0.49, 10=0.462, 25=0.416, 50=0.3696, 100=0.3542, 250=0.3234, 500=0.308, 1000=0.2541, 2500=0.231 (USD)", RoHS="RoHS Compliant", Shield Termination=Solder, Stock 1=75031, Supplier 1=Digi-Key
J4 J5 J6: library part 100_2_10, "Generic 2x10 2.54mm pitch header", JLCPCB Part #=C2894971, Manufacturer=Wavenumber, Manufacturer 1=HCTL, Manufacturer Part Number 1=PZ254-2-10-Z-8.5, F18=2, F19=10, Manufacturer Part Number=100_2_10
L1 L3: library part L0603-10µ-TDK, "Inductor, 250mA, ±20%, 1.05ohm. -55°C ~ 125°C", JLCPCB Part #=C2047264, Manufacturer="TDK Corporation", Manufacturer Part Number=MLZ1608M100WTD25, Part number IPS=N.A., Part number NEMS=100300079, Part number Norautron=26521771, Supplier Part Number 1=445-175588-1-ND, Artikkelnr Noca=N.A., Author=rsk, Component Class=Inductors, Component Status=Active, ComponentLink1Description=Datasheet, ComponentLink1URL=N.A., ComponentLink2Description="Supplier link", ComponentLink2URL=N.A., Footprint Doc=0603, HelpURL=https://product.tdk.com/info/en/catalog/datasheets/inductor_automotive_decoupling_mlz1608_en.pdf, LatestRevisionDate=2012-09-19, Note=N.A., Pad Count=2, Part Number=L0603-10µ-TDK, PartId=100300079, Published=2019-05-06, Supplier 1=Digi-Key, Supplier 2=Mouser, Supplier Part Number 2=810-MLZ1608M100WTD25
L2: library part L0402-15n-LQG15HS15NJ02D, "Inductor, 450mA, ±5%,  0.32ohm", JLCPCB Part #=C86059, Manufacturer=Murata, Manufacturer Part Number=LQG15HS15NJ02D, Part number IPS=N.A., Part number NEMS=100300412, Supplier Part Number 1=490-2625-2-ND, Artikkelnr Noca=N.A., Author=stl1, Component Class=Inductors, Component Status=Active, ComponentLink1Description=Datasheet, ComponentLink1URL=N.A., ComponentLink2Description="Supplier link", ComponentLink2URL=N.A., Footprint Doc=0402, HelpURL=https://no.mouser.com/datasheet/2/281/1/JELF243B_0010-1699614.pdf, LatestRevisionDate=2022-02-10, Note="High frequency chip inductor ±5%", Pad Count=2, Part Number=L0402-15n-LQG15HS15NJ02D, Part number Norautron=N.A., PartId=100300412, Published=2022-02-10, Supplier 1=Digi-Key, Supplier 2=Mouser, Supplier Part Number 2=81-LQG15HS15NJ02D
L4: library part L0402-4n7-LQG15HS4N7B02D, "Inductor, 700mA, ±0.1nH, 160mR LQG", JLCPCB Part #=C162543, Manufacturer=Murata, Manufacturer Part Number=LQG15HS4N7B02D, Part number IPS=N.A., Part number NEMS=100300410, Supplier Part Number 1=490-LQG15HS4N7B02DTR-ND, Artikkelnr Noca=N.A., Author=stl1, Component Class=Inductors, Component Status=Active, ComponentLink1Description=Datasheet, ComponentLink1URL=N.A., ComponentLink2Description="Supplier link", ComponentLink2URL=N.A., Footprint Doc=0402, HelpURL=https://search.murata.co.jp/Ceramy/image/img/P02/JELF243B-0010.pdf, LatestRevisionDate=2022-02-09, Note="High frequency chip inductor ±5%", Pad Count=2, Part Number=L0402-4n7-LQG15HS4N7B02D, Part number Norautron=N.A., PartId=100300410, Published=2022-02-09, Supplier 1=Digi-Key, Supplier 2=Mouser, Supplier Part Number 2=81-LQG15HS4N7B02D
MP1 MP2 MP3 MP4: library part M2.5, "M2.5 screw hole ISO standard 3.1mm clearance 8 conductivity holes 5.25mm pad size", Manufacturer=ISO, Category="Screw Mount", Internal Part Number=M2.5, Manufacturer Part Number=M2.5
R1: library part ERJ-3EKF1002V, "RES 10K OHM 1/10W 1% 0603 SMD", JLCPCB Part #=C191124, Limiting Element Voltage=75, Manufacturer="Panasonic Electronic Components", Maximum Overload Voltage=150, Maximum Working Voltage=31.6V, Package="0603 (1608 Metric)", Package Power="0603  (0.1W)", Power (Watts)="0.1W- 1/10W", Ratings=AEC-Q200, Resistance (Ohms)=10k, Sort Value=10000, Sort Value Package=603_10000, Supplier Package=0603, Temperature Coefficient=±100ppm/°C, Tolerance=±1%, Category=Resistors, Composition="Thick Film", Features=-, Height=0.55MM, Manufacturer 1="Panasonic Electronic Components", Manufacturer Part Number=ERJ-3EKF1002V, Manufacturer Part Number 1=ERJ-3EKF1002V, Number of Terminations=2, Packaging="Cut Tape (CT)", Size / Dimension="0.063\" L x 0.031\" W (1.60mm x 0.80mm)", Substitution Notes="10k , ±1% , 0603 , AEC-Q200"
R2 R3: library part ERJ-3EKF5101V, "RES 5.1K OHM 1/10W 1% 0603 SMD", JLCPCB Part #=C169254, Limiting Element Voltage=75, Manufacturer="Panasonic Electronic Components", Maximum Overload Voltage=150, Maximum Working Voltage=22.6V, Package="0603 (1608 Metric)", Package Power="0603  (0.1W)", Power (Watts)="0.1W- 1/10W", Ratings=AEC-Q200, Resistance (Ohms)=5.1k, Sort Value=5100, Sort Value Package=603_5100, Supplier Package=0603, Supplier Part Number 1=P5.10KHCT-ND, Temperature Coefficient=±100ppm/°C, Tolerance=±1%, Category=Resistors, ComponentLink2URL=http://industrial.panasonic.com/www-data/pdf/AOA0000/AOA0000CE2.pdf, Composition="Thick Film", Features=-, Height=0.55MM, Manufacturer 1="Panasonic Electronic Components", Manufacturer Part Number=ERJ-3EKF5101V, Manufacturer Part Number 1=ERJ-3EKF5101V, Number of Terminations=2, Packaging="Cut Tape (CT)", Size / Dimension="0.063\" L x 0.031\" W (1.60mm x 0.80mm)", Substitution Notes="5.1k , ±1% , 0603 , AEC-Q200", Supplier 1=Digi-Key
R4: library part ERJ-3GEY0R00V, "RES 0.0 OHM 1/10W JUMP 0603 SMD", JLCPCB Part #=C122704, Limiting Element Voltage=75, Manufacturer="Panasonic Electronic Components", Maximum Overload Voltage=150, Maximum Working Voltage=0.0V, Package="0603 (1608 Metric)", Package Power="0603  (0.1W)", Power (Watts)="0.1W- 1/10W", Ratings=AEC-Q200, Resistance (Ohms)=0, Sort Value Package=603_0, Supplier Package=0603, Supplier Part Number 1=P0.0GCT-ND, Temperature Coefficient=-, Tolerance=Jumper, Category=Resistors, Composition="Thick Film", Features=-, Height=0.55MM, Manufacturer 1="Panasonic Electronic Components", Manufacturer Part Number=ERJ-3GEY0R00V, Manufacturer Part Number 1=ERJ-3GEY0R00V, Number of Terminations=2, Size / Dimension="0.063\" L x 0.031\" W (1.60mm x 0.80mm)", Sort Value=0, Substitution Notes="0 , Jumper , 0603 , AEC-Q200", Supplier 1=Digi-Key
U1: "Cortex M4 MCU IC RF TXRX+MCU 802.15.4 73QFN", JLCPCB Part #=C190794, Manufacturer=Nordic, Manufacturer Part Number=NRF52840-QIAA-R
U2: "Ultra low power, 64M-bit, serial multi I/O flash memory", JLCPCB Part #=C2802849, Manufacturer=Macronix, Manufacturer Part Number=MX25R6435FZNIL0
U3: "6V Unidirectional 5.5V SOT-143 ESD and Surge Protection (TVS/ESD) ROHS", JLCPCB Part #=C12333, Manufacturer=Nexperia, Manufacturer Part Number=PRTR5V0U2X,215
X1: library part ECS-320-8-37B-CKY-TR, "32MHz 8pF ±10ppm SMD2016-4P", JLCPCB Part #=C2636238, Manufacturer=ECS, Package Power="PACKAGE (POWER)", Category=crystals/smt, Manufacturer Part Number=ECS-320-8-37B-CKY-TR
X2: library part NX3215SA-32.768K-STD-MUA-9, "32.768kHz 9pF ±20ppm SMD3215-2P", JLCPCB Part #=C519280, Manufacturer=NDK, Package Power="PACKAGE (POWER)", Category=crystals/smt, Manufacturer Part Number=NX3215SA-32.768K-STD-MUA-9

## Via types
v1: diameter 0.508/0.508/0.508/0.508/0.508/0.508 (per signal layer), hole 0.254, Top Layer to Bottom Layer, tented both sides, 70 vias
v2: diameter 0.31, hole 0.15, Top Layer to Bottom Layer, tented both sides, 24 vias
v3: diameter 0.5, hole 0.25, Top Layer to Bottom Layer, tented both sides, 16 vias
v4: diameter 0.61, hole 0.305, Top Layer to Bottom Layer, tented both sides, 7 vias
v5: diameter 0.762, hole 0.381, Top Layer to Bottom Layer, tented both sides, 2 vias

## Nets (pads, with @x,y where several pads share a name; then routed paths per layer and width w, separated by ;. In a path a pad name is that pad's centre, name@x,y a point inside that pad or via, vN(x,y) a via of type N, cw(c..) or ccw(c..) an arc to the next point about the centre after c; other vN are vias at no path point)
GND: C1.1 C2.1 C3.1 C4.1 C5.1 C6.1 C7.1 C8.1 C9.1 C10.1 C11.1 C12.1 C13.1 C14.1 C15.2 C16.2 C17.1 C18.1 C19.1 C20.1 C21.2 J1.3 J1.5 J1.9 J2.A1B12 J2.B1A12 J2.M1 J2.M2 J2.M3 J2.M4 J3.1 J3.2 J4.17 J5.19 J6.18 J6.20 MP1.1 MP2.1 MP3.1 MP4.1 R2.1 R3.1 U1.74 U1.B7 U1.F23 U2.4 U2.9 U3.1 X1.2 X1.4 | length 20.4
  Top Layer w0.254: v1(21.946,18.415) 21.958,18.428 21.958,19.045 C13.1 ; v1(22.563,31.547) C20.1@22.589,31.547 ; v1(23.038,18.491) C7.1 ; J3.1 23.138,33.603 v4(23.139,33.604) ; U1.B7 U1.74@24.408,23.138 ; U1.F23 24.408,26.138 v3(25.308,25.238) ; v4(26.137,33.63) 26.138,33.628 J3.2 ; C10.1 33.656,20.508 33.656,20.242 v1(33.731,20.168) ; v1@35.179,23.627 v1(35.225,23.627) ; v1(38.379,13.792) 38.405,13.818 40.508,13.818 42.113,15.423 U2.9 ; v1(42.164,22.352) R3.1 ; v1(42.24,29.032) 42.24,28.589 R2.1 ; J2.A1B12@44.267,22.2 44.267,21.425 44.611,21.08 J2.M1@44.842,21.08 ; J2.B1A12@44.267,28.6 44.267,29.375 J2.M2@44.611,29.72 ; C6.1 47.396,17.628 48.031,17.628 v4(48.057,17.602) ; J1.3 48.362,35.204 50.089,35.204 v1(50.114,35.23) ; J1.5 v1(50.14,36.449) ; J1.9 v4(48.336,39.827) ; J2.M3@49.022,21.08 J2.M3@49.54,21.08
  other v1: 22.488,14.3 25.823,14.3 31.801,17.54 28.397,19.032 19.464,20.574 19.011,22.962 19.751,24.257 20.328,25.857 20.328,26.899 31.234,27.915 16.954,28.346 19.991,28.346 23.655,29.337 21.141,29.796 22.53,29.812 16.992,29.845 26.162,30.396 22.538,30.734
  other v3: 24.108,22.838 25.308,22.838 26.508,22.838 27.708,22.838 24.108,24.038 25.308,24.038 26.508,24.038 27.708,24.038 24.108,25.238 26.508,25.238 27.708,25.238 24.108,26.438 25.308,26.438 26.508,26.438 27.708,26.438
NetC2_2: C2.2 C3.2 C4.2 L2.1 U1.B5 U1.E24 | length 19.2
  Top Layer w0.254: L2.1 20.38,21.606 C3.2@20.38,20.608 ; C3.2 20.414,22.864 v1(20.463,22.913) C4.2 ; C2.2 20.701,23.151 C4.2 ; U1.B5 20.784,22.639 20.511,22.912 C4.2 ; U1.E24 24.162,27.892 v1(24.162,28.505)
  IN2 w0.254: v1(20.463,22.913) 19.988,22.913 18.618,24.282 18.618,26.391 19.812,27.584 20.447,27.584 21.368,28.505 v1(24.162,28.505)
NetC5_2: C5.2 U1.N24 | length 1.3
  Top Layer w0.127: U1.N24 26.158,29.218 C5.2@26.162,29.222
NetC7_2: C7.2 U1.C1 | length 1.6
  Top Layer w0.254: C7.2 23.038,20.083 23.658,20.703 U1.C1
NetC8_2: C8.2 U1.A18 | length 1.4
  Top Layer w0.127: C8.2 21.308,25.888 U1.A18
NetC9_2: C9.2 U1.D23 | length 2.4
  Top Layer w0.254: C9.2 22.53,28.787 22.716,28.6 22.791,28.6 22.985,28.407 23.44,28.407 23.647,28.2 23.647,27.654 23.908,27.394 U1.D23
NetC10_2: C10.2 U1.AC5 | length 3.9
  Top Layer w0.203: U1.AC5 28.658,22.156 28.792,22.022 28.792,21.678 29.464,21.006 C10.2
NetC15_1: C15.1 U1.A23 X1.3 | length 5.4
  Top Layer w0.127: C15.1@18.504,28.346 18.529,28.346 19.291,27.584 20.803,27.584 20.962,27.744 20.962,28.171 X1.3 ; X1.3@21.149,28.308 22.069,27.388 U1.A23
NetC16_1: C16.1 U1.B24 X1.1 | length 7.6
  Top Layer w0.127: C16.1@18.542,29.845 19.962,29.845 X1.1 19.999,30.413 20.117,30.531 21.77,30.531 21.844,30.456 21.844,28.321 22.277,27.888 U1.B24
NetC19_2: C19.2 L4.1 U1.H23 | length 2.9
  Top Layer w0.127: C19.2 C19.2@24.666,29.326 ; 24.663,28.112 24.666,28.11 ; U1.H23@24.885,27.411 U1.H23
  Top Layer w0.156: C19.2 L4.1@24.655,30.175 ; C19.2@24.666,29.326 24.666,28.11 24.666,27.81 24.885,27.592 U1.H23@24.885,27.411
NetC20_2: C20.2 C21.1 J3.3 L4.2 | length 2.9
  Top Layer w0.127: C21.1 C21.1@23.588,30.734 ; C20.2@23.571,31.529 C20.2@23.589,31.547 ; C20.2@23.598,31.537 C20.2@23.589,31.547 ; C20.2@23.613,31.547 C20.2@23.589,31.547 ; 23.976,31.123 23.976,31.184 ; J3.3 J3.3@24.663,32.142
  Top Layer w0.156: C21.1@23.588,30.734 23.976,31.123 ; C20.2@23.613,31.547 23.976,31.184 L4.2 J3.3@24.663,32.142
NetJ2_A5: J2.A5 R3.2 | length 2
  Top Layer w0.254: R3.2 R3.2@42.261,24.317 ; R3.2@42.414,24.14 44.256,24.14 J2.A5@44.267,24.15
NetJ2_B5: J2.B5 R2.2 | length 2
  Top Layer w0.127: R2.2 R2.2@42.305,27.074 ; R2.2@42.331,27.15 J2.B5@44.267,27.15
NetL1_2: L1.2 U1.AB2 | length 2.9
  Top Layer w0.203: U1.AB2 28.422,21.874 28.422,21.54 29.388,20.574 29.388,20.284 L1.2@29.998,19.674
NetL2_2: L2.2 L3.1 | length 3.4
  Top Layer w0.254: L3.1 18.883,19.329 18.635,19.577 18.61,19.577 18.288,19.899 18.288,21.133 18.796,21.641 L2.2
NetL3_2: L3.2 U1.B3 | length 5.3
  Top Layer w0.254: L3.2 20.347,19.418 20.84,19.418 21.184,19.761 21.184,21.768 21.554,22.138 U1.B3
NetR4_1: R4.1 U1.Y2 | length 7.9
  Top Layer w0.203: U1.Y2@27.922,21.874 27.922,21.855 28.092,21.685 28.092,21.235 29.007,20.32 29.007,17.12 30.531,15.596 R4.1
P0.00: C17.2 J5.17 U1.D2 X2.2 | length 20.6
  Top Layer w0.127: J5.17 16.51,10.185 17.602,11.278 21.971,11.278 23.538,12.845 C17.2 ; X2.2@23.37,15.215 X2.2@23.367,15.217 ; C17.2@23.638,14.3 23.604,14.3 23.367,14.537 X2.2@23.367,15.217 ; U1.D2 23.908,21.885 24.054,21.74 24.054,17.423 22.931,16.3 X2.2 23.367,15.464 X2.2@23.367,15.217
P0.01: C18.2 J5.15 U1.F2 X2.1 | length 19.4
  Top Layer w0.127: J5.15 19.05,9.068 20.393,10.411 23.619,10.411 24.773,11.565 C18.2 ; U1.F2 24.408,21.848 24.32,21.76 24.32,17.411 25.431,16.3 X2.1 24.994,15.464 24.994,14.562 24.758,14.326 C18.2@24.673,14.326
P0.02: J4.1 U1.A12 | length 23.1
  Top Layer w0.127: v1(21.538,24.383) 21.541,24.386 22.656,24.386 U1.A12
  IN1 w0.127: J4.1 13.97,41.656 15.748,39.878 15.748,36.652 20.498,31.902 20.498,28.664 20.853,28.308 20.853,25.07 21.538,24.385 v1(21.538,24.383)
P0.03: J4.2 U1.B13 | length 32.3
  IN2 w0.127: J4.2 15.291,44.399 15.291,41.631 20.828,36.093 24.994,36.093 26.975,34.112 26.975,28.682 25.902,27.61 23.546,27.61 22.631,26.695 22.631,25.165 v2(23.158,24.638)
P0.04: J4.3 U1.J1 | length 29.1
  Top Layer w0.127: v1(25.121,19.507) 25.139,19.526 25.139,21.369 U1.J1
  IN1 w0.127: J4.3 16.51,37.287 21.869,31.928 21.869,27.343 22.479,26.733 22.479,22.149 v1(25.121,19.507)
P0.05: J4.4 U1.K2 | length 29.2
  Top Layer w0.152: J4.4 17.755,44.475 17.755,40.792 20.066,38.481 v1(22.987,38.481)
  IN1 w0.127: v1(22.987,38.481) 24.773,36.695 24.773,22.53 25.408,21.895 v2(25.408,21.888)
P0.06: J4.5 U1.L1 | length 36.3
  Top Layer w0.127: U1.L1 25.658,18.817 v1(25.679,18.796)
  IN1 w0.127: v1(15.011,38.405) 15.011,25.705 18.567,22.149 21.59,22.149 24.943,18.796 v1(25.679,18.796)
  Bottom Layer w0.127: v1(15.011,38.405) 16.815,38.405 19.05,40.64 J4.5
P0.07: J4.6 U1.M2 | length 33.4
  IN1 w0.127: J4.6 20.574,47.244 24.765,47.244 25.4,46.609 25.4,40.843 25.933,40.31 25.933,38.075 27.432,36.576 27.432,29.82 25.908,28.296 v2(25.908,21.888)
P0.08: J4.7 U1.N1 | length 28.2
  Top Layer w0.127: U1.N1 26.181,21.365 26.181,19.615 v1(26.238,19.558)
  IN1 w0.127: J4.7 21.59,37.846 24.079,35.357 24.079,32.893 23.073,31.887 23.073,28.108 23.667,27.514 23.667,22.129 v1(26.238,19.558)
P0.09: J4.8 U1.L24 | length 20.3
  Top Layer w0.127: v2(25.562,28.524) 25.562,28.475 25.658,28.379 U1.L24
  IN1 w0.127: v1(25.273,38.989) 25.273,37.744 25.562,37.455 v2(25.562,28.524)
  Bottom Layer w0.127: J4.8 22.835,44.475 22.835,40.107 23.952,38.989 v1(25.273,38.989)
P0.10: J4.9 U1.J24 | length 15.7
  Top Layer w0.127: v2(25.126,28.526) 25.142,28.51 25.142,27.904 U1.J24
  IN1 w0.127: J4.9 24.13,38.176 25.126,37.181 v2(25.126,28.526)
P0.11: J4.10 U1.T2 | length 27
  Bottom Layer w0.127: J4.10 25.375,44.475 25.375,41.732 26.289,40.818 26.289,36.906 28.675,34.52 28.675,27.599 28.219,27.143 28.219,22.276 27.832,21.888 v2(26.908,21.888)
P0.12: J4.11 U1.U1 | length 40.5
  Top Layer w0.127: J4.11 26.67,41.656 30.099,38.227 v1(34.442,38.227) ; U1.U1 27.158,19.603 v1(27.584,19.177)
  IN1 w0.127: v1(27.584,19.177) 27.584,20.396 29.21,22.022 34.773,22.022 37.211,24.46 37.211,35.458 v1(34.442,38.227)
P0.13: J4.12 U1.AD8 | length 31.1
  Top Layer w0.127: U1.AD8 30.193,23.388 v1(30.201,23.396)
  IN1 w0.127: J4.12 27.94,44.45 27.94,40.259 36.144,32.055 36.144,27.026 32.512,23.393 30.203,23.393 v1(30.201,23.396)
P0.14: J4.13 U1.AC9 | length 29.9
  IN1 w0.127: v2(28.658,23.638) 29.715,22.581 32.717,22.581 36.703,26.566 36.703,33.274 29.21,40.767 J4.13
P0.15: J4.14 U1.AD10 | length 28.6
  Top Layer w0.127: U1.AD10 30.798,23.888 31.25,23.437 32.454,23.437 34.214,25.197 v1(34.214,28.88)
  IN2 w0.127: J4.14 30.48,44.45 30.48,39.04 34.214,35.306 v1(34.214,28.88)
P0.16: J4.15 U1.AC11 | length 22.1
  IN1 w0.127: v2(28.658,24.138) 29.258,24.138 29.769,24.649 29.769,29.235 30.797,30.264 32.093,30.264 32.448,30.62 32.448,34.227 v1(32.385,34.29)
  Bottom Layer w0.127: J4.15 31.75,39.345 32.385,38.71 v1(32.385,34.29) v1@32.322,34.353
P0.17: J4.16 U1.AD12 U2.1 | length 36.6
  Top Layer w0.127: U1.AD12 31.34,24.388 v1(31.783,23.945) ; v1(37.033,17.628) U2.1
  IN1 w0.127: v1(31.783,23.945) 31.783,25.164 31.496,25.451 31.496,27 32.995,28.499 v1(32.995,33.731)
  Bottom Layer w0.127: J4.16 32.995,44.475 v1(32.995,33.731) ; v1(31.783,23.945) 36.754,18.974 36.754,17.977 37.033,17.697 v1(37.033,17.628)
P0.19: J5.1 U1.AC15 U2.6 | length 38.9
  Top Layer w0.127: U2.6 v1(46.33,15.088)
  IN2 w0.127: v1(36.83,10.897) 37.541,10.185 42.977,10.185 44.145,11.354 44.145,14.427 44.806,15.088 v1(46.33,15.088)
  Bottom Layer w0.127: v2(28.658,25.138) 28.918,25.138 29.337,24.719 29.337,13.614 32.055,10.897 v1(36.83,10.897) J5.1
P0.20: J5.2 U1.AD16 U2.5 | length 44.3
  Top Layer w0.127: U1.AD16 31.991,25.388 v1(32.609,24.77) ; U2.5 44.896,13.83 46.266,13.83 v1(46.279,13.843)
  Top Layer w0.152: J5.2 38.837,5.08 39.624,5.867 39.624,8.636 41.224,10.236 45.034,10.236 46.279,11.481 v1(46.279,13.843)
  Bottom Layer w0.127: v1(32.609,24.77) 37.592,19.787 37.592,16.256 37.084,15.748 37.084,14.289 38.749,12.624 45.06,12.624 v1(46.279,13.843)
P0.21: J5.3 U1.AC17 U2.2 | length 28.3
  Top Layer w0.127: J5.3 34.29,12.09 v1(35.636,13.437) 35.636,13.456 35.941,13.76 35.941,15.646 36.652,16.358 U2.2
  Bottom Layer w0.127: v2(28.658,25.638) 29.628,25.638 30.709,24.558 30.709,18.004 35.203,13.509 35.563,13.509 v1(35.636,13.437)
P0.22: J5.4 U1.AD18 U2.3 | length 30.4
  Top Layer w0.127: U1.AD18@29.163,25.883 v1(32.182,25.883) ; J5.4@34.798,5.588 35.458,6.248 35.458,11.963 37.922,14.427 v1(37.922,15.062) ; v1@37.922,15.088 U2.3
  Bottom Layer w0.127: v1(32.182,25.883) 32.639,25.425 35.433,25.425 38.379,22.479 38.379,15.519 v1(37.922,15.062)
P0.23: J5.5 U1.AC19 U2.7 | length 46.6
  Top Layer w0.127: U2.7 v1(46.33,16.358)
  IN2 w0.127: v1@41.986,11.76 41.986,14.478 43.866,16.358 v1(46.33,16.358)
  Bottom Layer w0.127: v2(28.658,26.138) 29.947,26.138 31.096,24.989 31.096,19.261 38.648,11.709 v1(41.935,11.709) 41.935,9.525 38.76,6.35 32.664,6.35 J5.5@31.292,7.722
P0.24: J5.6 U1.AD20 | length 26.7
  Top Layer w0.127: U1.AD20 29.181,26.411 29.268,26.411 29.273,26.416 v1(33.223,26.416)
  IN2 w0.127: J5.6@32.258,5.588 33.02,6.35 33.02,16.027 34.9,17.907 34.9,21.374 33.782,22.492 33.782,25.857 v1(33.223,26.416)
P0.25: J5.7 U1.AC21 | length 19.1
  IN2 w0.127: v2(28.658,26.638) 28.931,26.638 29.221,26.348 J5.7@29.221,7.981
P0.26: J5.8 U1.G1 | length 19.3
  Top Layer w0.127: U1.G1 24.658,18.547 25.451,17.755 27.47,17.755 28.016,17.209 28.016,8.195 28.016,6.147 J5.8@29.074,5.089
P0.27: J5.9 U1.H2 | length 15.4
  IN2 w0.127: v2(24.908,21.888) 24.435,21.415 24.435,18.059 26.67,15.824 J5.9
P0.28: J5.10 U1.B11 | length 20.7
  IN2 w0.127: v2(23.158,24.138) 23.411,24.138 23.597,23.952 23.597,20.574 23.952,20.218 23.952,12.065 25.378,10.639 25.378,6.372 J5.10
P0.29: J5.11 U1.A10 | length 28.6
  Top Layer w0.127: v1(22.034,23.774) 22.138,23.774 22.251,23.888 U1.A10
  IN2 w0.127: v1@17.551,21.731 17.551,16.459 20.283,13.728 20.283,7.149 20.32,7.112 20.55,6.882 21.107,6.325 22.835,6.325 J5.11@24.638,8.128
  Bottom Layer w0.127: v1(17.501,21.742) 17.524,21.719 21.617,21.719 22.479,22.581 22.479,23.343 22.047,23.774 v1(22.034,23.774)
P0.30: J5.12 U1.B9 | length 19.9
  IN2 w0.127: v2(23.158,23.638) 23.158,20.669 22.479,19.99 22.479,16.993 23.368,16.104 v1(23.368,9.957)
  Bottom Layer w0.127: v1(23.368,9.957) 22.874,9.462 22.874,6.336 J5.12
P0.31: J5.13 U1.A8 | length 17.3
  Top Layer w0.127: v1(21.488,23.241) 22.316,23.241 22.435,23.36 22.63,23.36 U1.A8
  IN2 w0.127: v1(21.488,23.241) 21.031,22.784 21.031,17.094 21.59,16.535 J5.13
P1.00: J6.1 U1.AD22 | length 38.3
  Top Layer w0.127: J6.1@5.534,37.554 J6.1 7.366,39.116 16.916,39.116 18.085,37.948 19.004,37.948 ; 18.965,37.948 19.004,37.948 ; v1(27.33,37.948) 19.004,37.948 ; U1.AD22 29.181,26.911 v1(30.493,26.911)
  Bottom Layer w0.127: v1(27.33,37.948) 29.515,35.763 29.515,27.89 v1(30.493,26.911)
P1.01: J6.2 U1.Y23 | length 27
  Bottom Layer w0.127: J6.2@8.202,36.855 24.282,36.855 27.908,33.23 v2(27.908,27.388)
P1.02: J6.3 U1.W24 | length 31.1
  Top Layer w0.127: J6.3@5.032,34.267 6.274,35.509 13.157,35.509 13.741,36.093 26.873,36.093 27.658,35.309 U1.W24
P1.03: J6.4 U1.V23 | length 24.3
  Bottom Layer w0.127: J6.4@8.045,34.214 16.236,34.214 17.608,32.842 25.476,32.842 27.408,30.91 v2(27.408,27.388)
P1.04: J6.5 U1.U24 | length 30.8
  Top Layer w0.127: J6.5@5.286,32.083 6.299,33.096 13.233,33.096 15.57,35.433 26.997,35.433 27.28,35.15 27.28,28.575 27.158,28.453 U1.U24
P1.05: J6.6 U1.T23 | length 21.9
  Bottom Layer w0.127: J6.6@8.168,31.801 17.094,31.801 17.577,32.283 23.622,32.283 26.908,28.998 v2(26.908,27.388)
P1.06: J6.7 U1.R24 | length 31.7
  Top Layer w0.127: J6.7@4.75,29.083 5.105,29.083 6.502,30.48 14.376,30.48 18.872,34.976 26.83,34.976 26.904,34.901 26.904,28.834 26.658,28.588 U1.R24
P1.07: J6.8 U1.P23 | length 19
  Bottom Layer w0.127: J6.8@8.069,29.083 20.549,29.083 22.244,27.388 v2(26.408,27.388)
P1.08: J6.9 U1.P2 | length 35.1
  Bottom Layer w0.127: J6.9 3.912,26.67 3.073,25.832 3.073,18.872 4.115,17.831 13.995,17.831 15.526,19.361 22.384,19.361 23.68,20.657 25.813,20.657 26.408,21.252 v2(26.408,21.888)
P1.09: J6.10 U1.R1 | length 45
  Top Layer w0.127: U1.R1 26.658,20.251 26.797,20.112 v1(26.797,18.72)
  Bottom Layer w0.127: J6.10 6.35,27.94 4.14,27.94 2.21,26.01 2.21,17.424 4.445,15.189 16.675,15.189 18.936,17.45 25.527,17.45 v1(26.797,18.72)
P1.10: J6.11 U1.A20 | length 18.5
  Top Layer w0.127: J6.11 6.286,25.336 11.569,25.336 12.621,26.388 U1.A20
P1.11: J6.12 U1.B19 | length 16.7
  Bottom Layer w0.127: J6.12 7.798,23.952 10.897,23.952 13.297,26.352 21.174,26.352 21.389,26.138 v2(23.158,26.138)
P1.12: J6.13 U1.B17 | length 19.9
  Bottom Layer w0.127: J6.13 5.08,21.895 6.071,22.885 12.929,22.885 15.367,25.324 21.209,25.324 21.523,25.638 v2(23.158,25.638)
P1.13: J6.14 U1.A16 | length 17.3
  Top Layer w0.127: J6.14@6.896,21.59 10.744,21.59 14.542,25.388 U1.A16
P1.14: J6.15 U1.B15 | length 20.6
  Bottom Layer w0.127: J6.15 6.257,20.227 13.191,20.227 17.852,24.888 22.204,24.888 22.454,25.138 v2(23.158,25.138)
P1.15: J6.16 U1.A14 | length 18
  Top Layer w0.127: J6.16@7.113,19.05 11.379,19.05 17.217,24.888 U1.A14
RESET: J1.10 J4.19 R1.2 U1.AC13 | length 33.8
  Top Layer w0.127: v1(32.004,31.013) 32.022,30.996 32.85,30.996 38.163,36.309 40.754,36.309 41.707,37.262 41.707,38.977 R1.2 ; J4.19 40.742,43.18 41.719,42.203 R1.2 ; J1.10 R1.2
  IN1 w0.127: v2(28.658,24.638) 29.025,24.638 29.42,25.033 29.42,29.7 30.734,31.013 v1(32.004,31.013)
SWD-CLK: J1.4 U1.AA24 | length 19.8
  Top Layer w0.127: U1.AA24 28.158,28.996 28.981,29.82 32.664,29.82 38.024,35.179 J1.4
SWD-IO: J1.2 U1.AC24 | length 18.6
  Top Layer w0.127: U1.AC24 28.658,28.785 29.261,29.388 32.995,29.388 37.516,33.909 J1.2
USB-DM: J2.A7 J2.B7 U1.AD4 U3.2 | length 19.9
  Top Layer w0.152: U1.AD4 29.325,22.555 32.41,22.555 34.861,25.006 37.135,25.006 ; U3.2 37.135,25.006 ; J2.A7@44.267,25.65 45.029,25.65 45.212,25.467 45.212,24.821 45.041,24.65 J2.B7 43.524,24.65 43.167,25.006 37.135,25.006
USB-DP: J2.A6 J2.B6 U1.AD6 U3.3 | length 18.9
  Top Layer w0.152: U1.AD6 32.311,22.888 34.722,25.298 37.135,25.298 ; U3.3 37.135,25.298 ; J2.B6@44.267,26.15 43.422,26.15 42.977,25.705 42.977,25.298 ; J2.A6 43.484,25.15 43.336,25.298 42.977,25.298 ; 37.135,25.298 42.977,25.298
VBUS: D2.1 J2.A4B9 J2.B4A9 J4.18 J5.18 J6.17 U1.AD2 U3.4 | length 142.1
  Top Layer w0.254: U1.AD2 29.852,21.888 30.036,22.073 35.433,22.073 36.014,21.492 36.014,21.069 36.856,20.227 D2.1 38.033,20.177 39.141,21.285 39.141,22.377 40.259,23.495 42.799,23.495 43.294,23 44.267,23 44.356,23.089 45.162,23.089 45.644,23.571 45.644,27.254 45.223,27.675 44.392,27.675 J2.B4A9@44.267,27.8
  Top Layer w0.508: 3.327,16.307 3.327,12.548 4.97,10.905 7.247,10.905 10.033,8.119 10.033,4.445 11.278,3.2 14.63,3.2 J5.18 J5.18@16.734,4.856 ; J6.17 3.327,16.51 3.327,38.811 4.826,40.31 9.322,40.31 11.252,42.24 11.252,45.441 13.741,47.93 34.069,47.93 34.366,47.632 34.366,45.796 J4.18 ; U3.4 35.233,27.181 35.852,27.8 38.024,27.8 ; v5(38.024,31.547) 38.024,27.8 ; J2.B4A9@44.267,27.8 38.024,27.8
  IN1 w0.406: J4.18 35.56,44.45 35.56,39.192 38.024,36.728 v5(38.024,31.547)
VDD: C1.2 C6.2 C11.2 C12.2 C13.2 C14.2 J1.1 J4.20 J5.16 L1.1 R1.1 U1.A22 U1.AD14 U1.AD23 U1.B1 U1.W1 U2.8 | length 224.8
  Top Layer w0.127: U1.AD14 31.627,24.888 32.253,24.262 32.873,24.262 33.68,25.07 33.68,27.864 33.02,28.524 30.284,28.524 C12.2 ; U1.AD23 29.683,27.388 30.209,27.915 C12.2 ; v1(30.302,28.575) 30.302,27.932 C12.2 ; C1.2@31.726,19.29 C1.2 ; v1@32.805,19.29 v1(32.817,19.279)
  Top Layer w0.254: v1(21.343,27.131) 21.343,26.951 21.284,26.892 22.654,26.892 U1.A22 ; C13.2 v1(21.971,20.803) 21.971,21.158 22.201,21.388 U1.B1 ; U1.W1 27.658,20.348 27.846,20.16 C14.2@28.397,20.16 ; v1(29.997,17.678) L1.1 30.785,18.35 C1.2@31.726,19.29 ; C1.2 v1@32.805,19.29 ; v4(40.005,42.545) 40.066,42.484 40.066,38.992 R1.1 ; v1(44.907,18.313) 44.883,18.289 U2.8 44.9,17.611 46.288,17.611 C6.2@46.304,17.595 ; J1.1 48.362,33.884 v5(48.362,33.122)
  Top Layer w0.508: J5.16@19.558,5.08 19.514,5.08 18.974,4.54 18.974,3.48 17.177,1.683 5.81,1.683 1.626,5.867 1.626,45.136 5.41,48.92 35.052,48.92 36.83,47.142 J4.20
  IN1 w0.254: v1(21.971,20.803) 25.095,17.678 v1(29.997,17.678) 29.997,19.279 ; v1(28.397,19.982) 29.294,19.982 29.997,19.279 ; J4.20 39.954,42.596 39.954,33.782 43.299,30.437 43.299,25.61 ; v1(44.907,18.313) 44.264,18.313 43.299,19.279 ; v4(47.041,26.372) 46.279,25.61 43.299,25.61 ; 29.997,19.279 v1(32.817,19.279) 43.299,19.279 ; 43.299,19.279 43.299,25.61
  IN2 w0.254: v1(21.343,27.131) 21.343,25.748 22.644,24.448 22.644,21.475 v1(21.971,20.803) ; v1(30.302,28.575) 30.683,28.956 32.817,28.956 36.162,25.61 46.279,25.61 v4(47.041,26.372) 47.041,31.801 v5(48.362,33.122)
VDDH: D1.3 D2.3 J5.14 R4.2 | length 29.4
  Top Layer w0.254: D2.3@35.89,18.126 D2.3
  Top Layer w0.508: J5.14 21.706,4.964 21.706,3.948 23.114,2.54 28.943,2.54 30.455,4.052 30.455,12.053 32.551,14.149 R4.2 33.376,15.596 34.29,16.51 34.29,17.272 34.633,17.615 35.941,17.615 ; D1.3 35.941,17.615 ; D2.3 35.941,17.615
VEXT: D1.1 J5.20 J6.19 | length 46.1
  Top Layer w0.508: J6.19 5.08,13.767 6.756,12.09 8.255,12.09 11.328,9.017 11.328,5.664 11.913,5.08 J5.20 ; v4(34.188,13.132) 34.214,13.132 35.026,13.944 D1.1
  IN1 w0.508: J5.20@13.617,5.103 13.617,5.117 13.195,5.538 13.181,5.538 11.836,6.883 11.836,9.703 15.265,13.132 v4(34.188,13.132)
pads on no net: D1.2 D2.2 FID1.1 FID2.1 FID3.1 FID4.1 J1.6 J1.7 J1.8 J1.M J2.71 J2.A8 J2.ALIGN1 J2.B8

## Polygon pours and split planes (outlines as drawn)
GND on GND1 "NONET_L-01_P-001" (solid, remove dead copper, pour order 0): -9.652,60.198 -9.652,-3.302 56.388,-3.302 56.388,60.198
GND on GND2 "NONET_L-01_P-001" (solid, remove dead copper, pour order 1): -12.192,60.198 -12.192,-5.842 66.548,-5.842 66.548,60.198

## Keep-outs
Keep-Out Layer:
  the board outline again, w0.025

## Silkscreen, mask and mechanical layers (free items; w line width, h text height)
Top Overlay:
  circle w0.381: c18.959,30.438 r0.203
  circle w0.381: c50.317,32.893 r0.203
  lines w0.025: 0,8.255 ccw(c8.255,8.255) 8.255,0 ; 0,42.545 cw(c8.255,42.545) 8.255,50.8 ; 42.545,0 ccw(c42.545,8.255) 50.8,8.255 ; 42.545,50.8 cw(c42.545,42.545) 50.8,42.545
  lines w0.05: 0,8.255 0,42.545 ; 8.255,0 42.545,0 ; 8.255,50.8 42.545,50.8 ; 50.8,8.255 50.8,42.545
  text "VDD" at 37.871,47.036 h1.52 r90
  text "0-03" at 14.986,46.99 h1.52 r90
  text "0-05" at 17.526,46.99 h1.52 r90
  text "0-07" at 20.066,46.99 h1.52 r90
  text "0-09" at 22.606,46.99 h1.52 r90
  text "0-11" at 25.273,46.99 h1.52 r90
  text "0-13" at 27.686,46.99 h1.52 r90
  text "0-15" at 30.226,46.99 h1.52 r90
  text "0-17" at 32.766,46.99 h1.52 r90
  text "VBUS" at 35.307,46.994 h1.27 r90
  text "0-02" at 14.986,38.1 h1.52 r90
  text "0-04" at 17.526,38.1 h1.52 r90
  text "0-06" at 20.066,38.1 h1.52 r90
  text "0-08" at 22.606,38.1 h1.52 r90
  text "0-10" at 25.146,38.1 h1.52 r90
  text "0-12" at 27.686,38.1 h1.52 r90
  text "0-14" at 30.226,38.1 h1.52 r90
  text "0-16" at 32.766,38.1 h1.52 r90
  text "GND" at 35.179,38.1 h1.52 r90
  text "RST" at 37.846,38.1 h1.52 r90
  text ".PCB_PART_NUMBER" at 13.165,36.07 h1.52
  text "1-00" at 0,35.825 h1.52
  text "1-01" at 8.89,35.825 h1.52
  text ".PCB_MIXDOWN" at 20.582,35.316 h2.03
  text ".PCB_DATE" at 13.149,34.902 h1.52
  text "1-02" at 0,33.401 h1.52
  text "1-03" at 8.89,33.412 h1.52
  text "1-04" at 0,30.872 h1.52
  text "1-05" at 8.89,30.872 h1.52
  text "W" at 28.024,28.884 h4.44
  text "1-06" at 0,28.332 h1.52
  text "1-07" at 8.89,28.332 h1.52
  text "1-09" at 8.89,25.791 h1.52
  text "1-08" at 0,25.664 h1.52
  text "1-11" at 8.89,23.26 h1.52
  text "1-10" at 0,23.241 h1.52
  text "1-12" at 0,20.847 h1.52
  text "1-13" at 8.89,20.712 h1.52
  text "1-14" at 0,18.307 h1.52
  text "1-15" at 8.89,18.172 h1.52
  text "VBUS" at -0.025,15.539 h1.27
  text "GND" at 8.915,15.499 h1.52
  text "VEXT" at 0,13.144 h1.27
  text "GND" at 8.763,12.705 h1.52
  text "0-31" at 22.49,9.028 h1.52 r90
  text "0-29" at 25.156,9.027 h1.52 r90
  text "0-27" at 27.697,9.028 h1.52 r90
  text "0-25" at 30.237,9.028 h1.52 r90
  text "0-23" at 32.766,9.028 h1.52 r90
  text "0-21" at 35.306,9.028 h1.52 r90
  text "0-19" at 37.719,9.027 h1.52 r90